# Altium PCB NBP11 Xilinx Spartan-III BGA456 Rev1.01.PcbDoc (part 1 of 3)
Units mm, origin at the board's own origin, x right, y up, seen from the top; angles counter-clockwise.
Board outline 69 x 80.99 mm, 6 copper layers (Top Layer, MidLayer1, InternalPlane1, InternalPlane2, MidLayer2, Bottom Layer); 105 components, 277 nets, 967 pads, 559 vias.
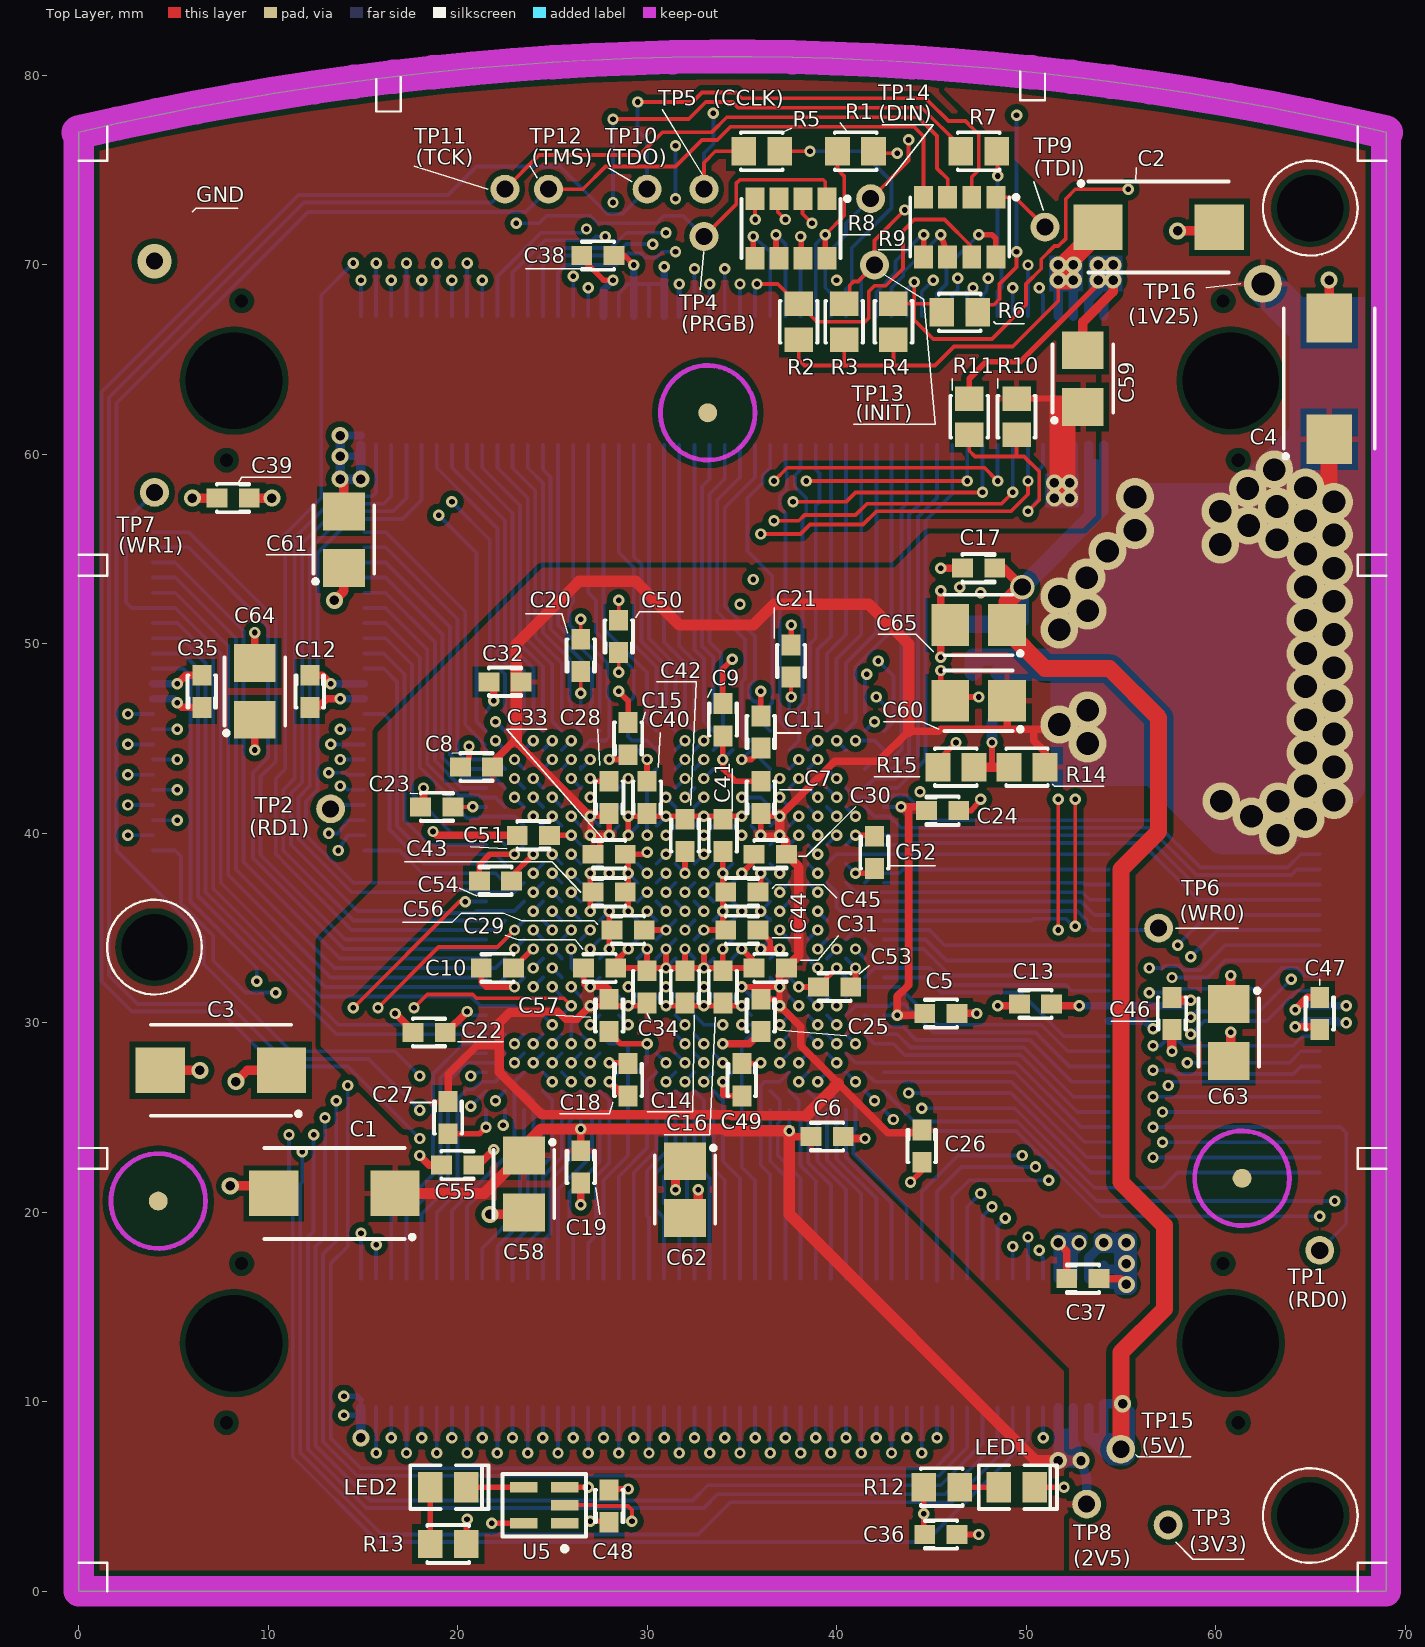
[diagram p0: Top Layer view]
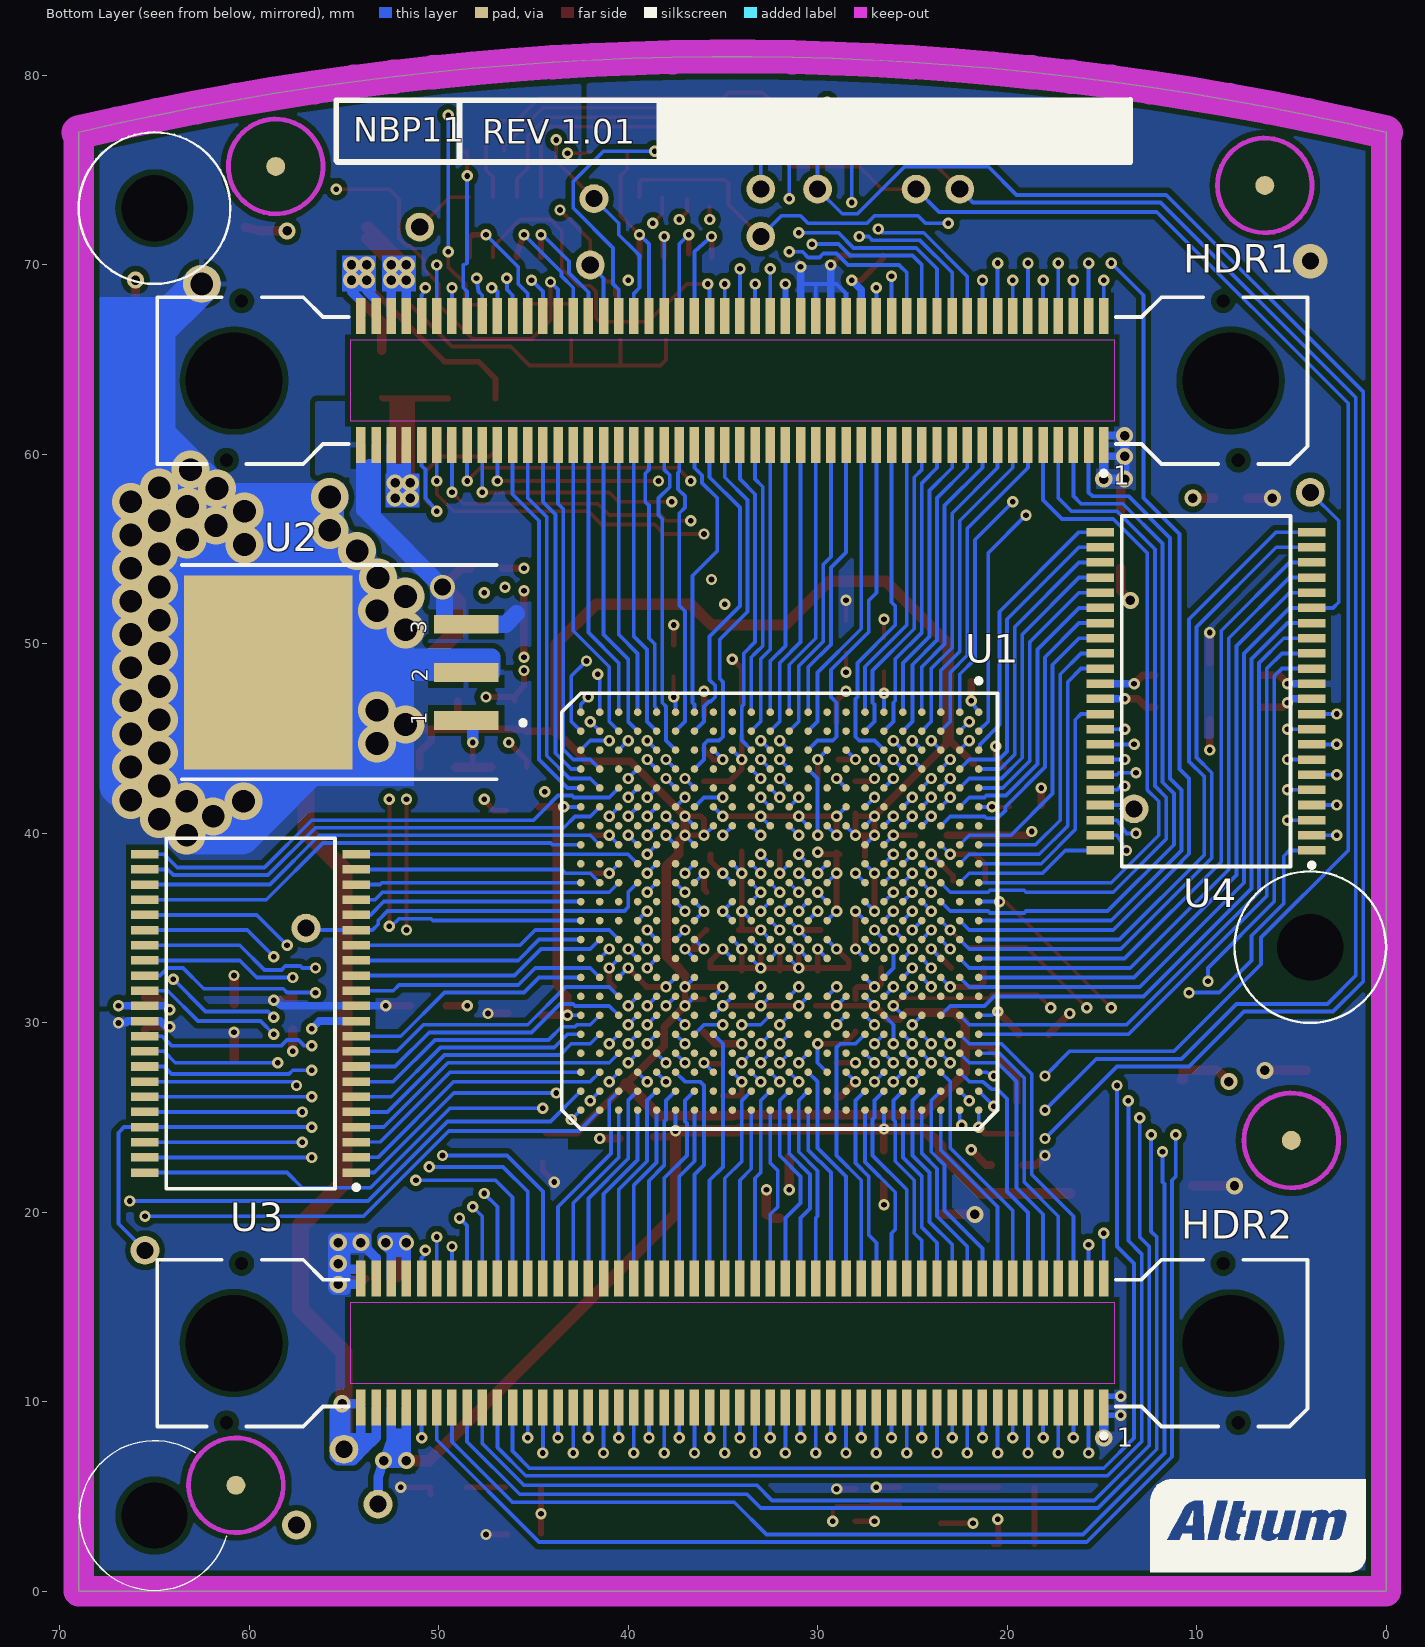
[diagram p1: Bottom Layer view, seen from below]
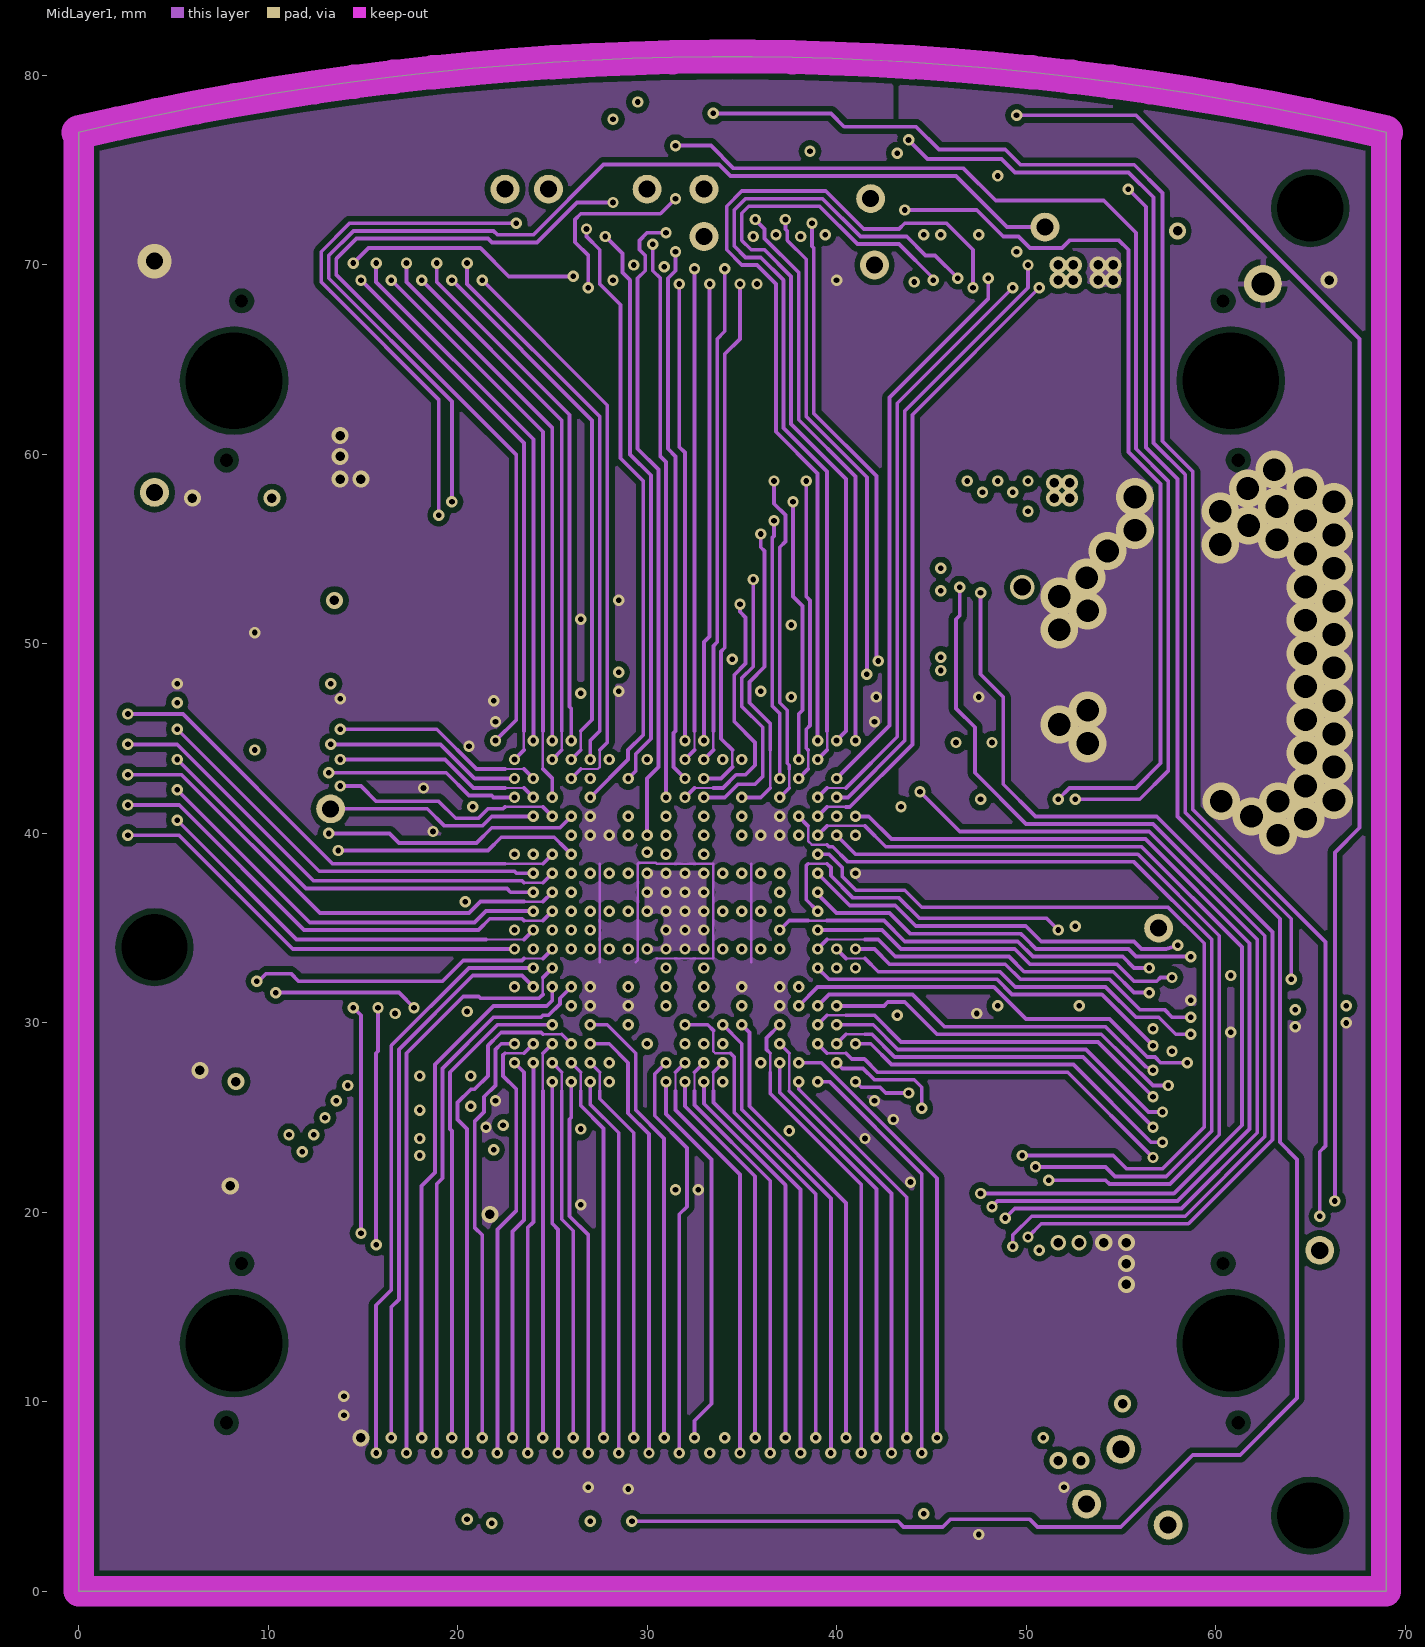
[diagram p2: MidLayer1]
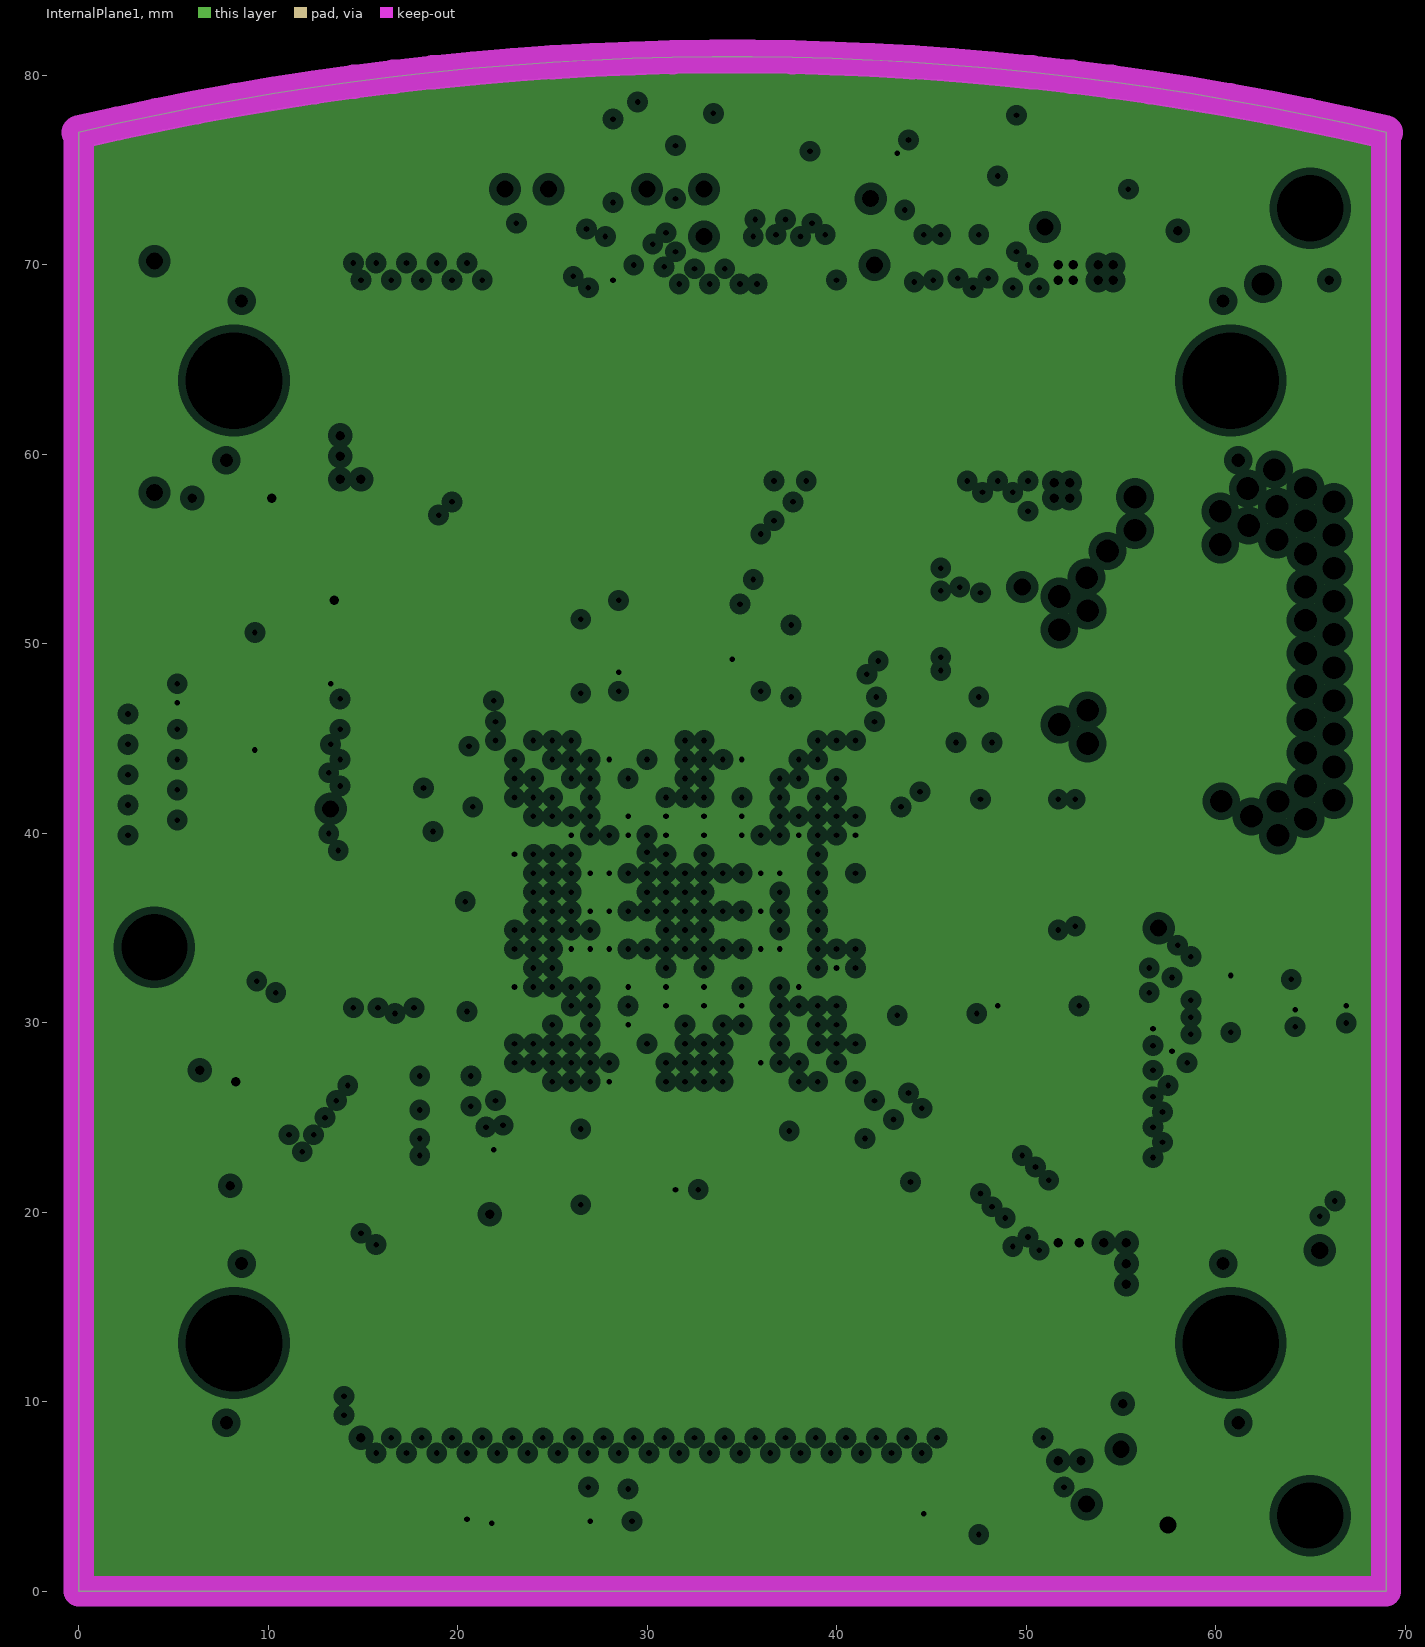
[diagram p3: InternalPlane1, clearances drawn from the general rule]
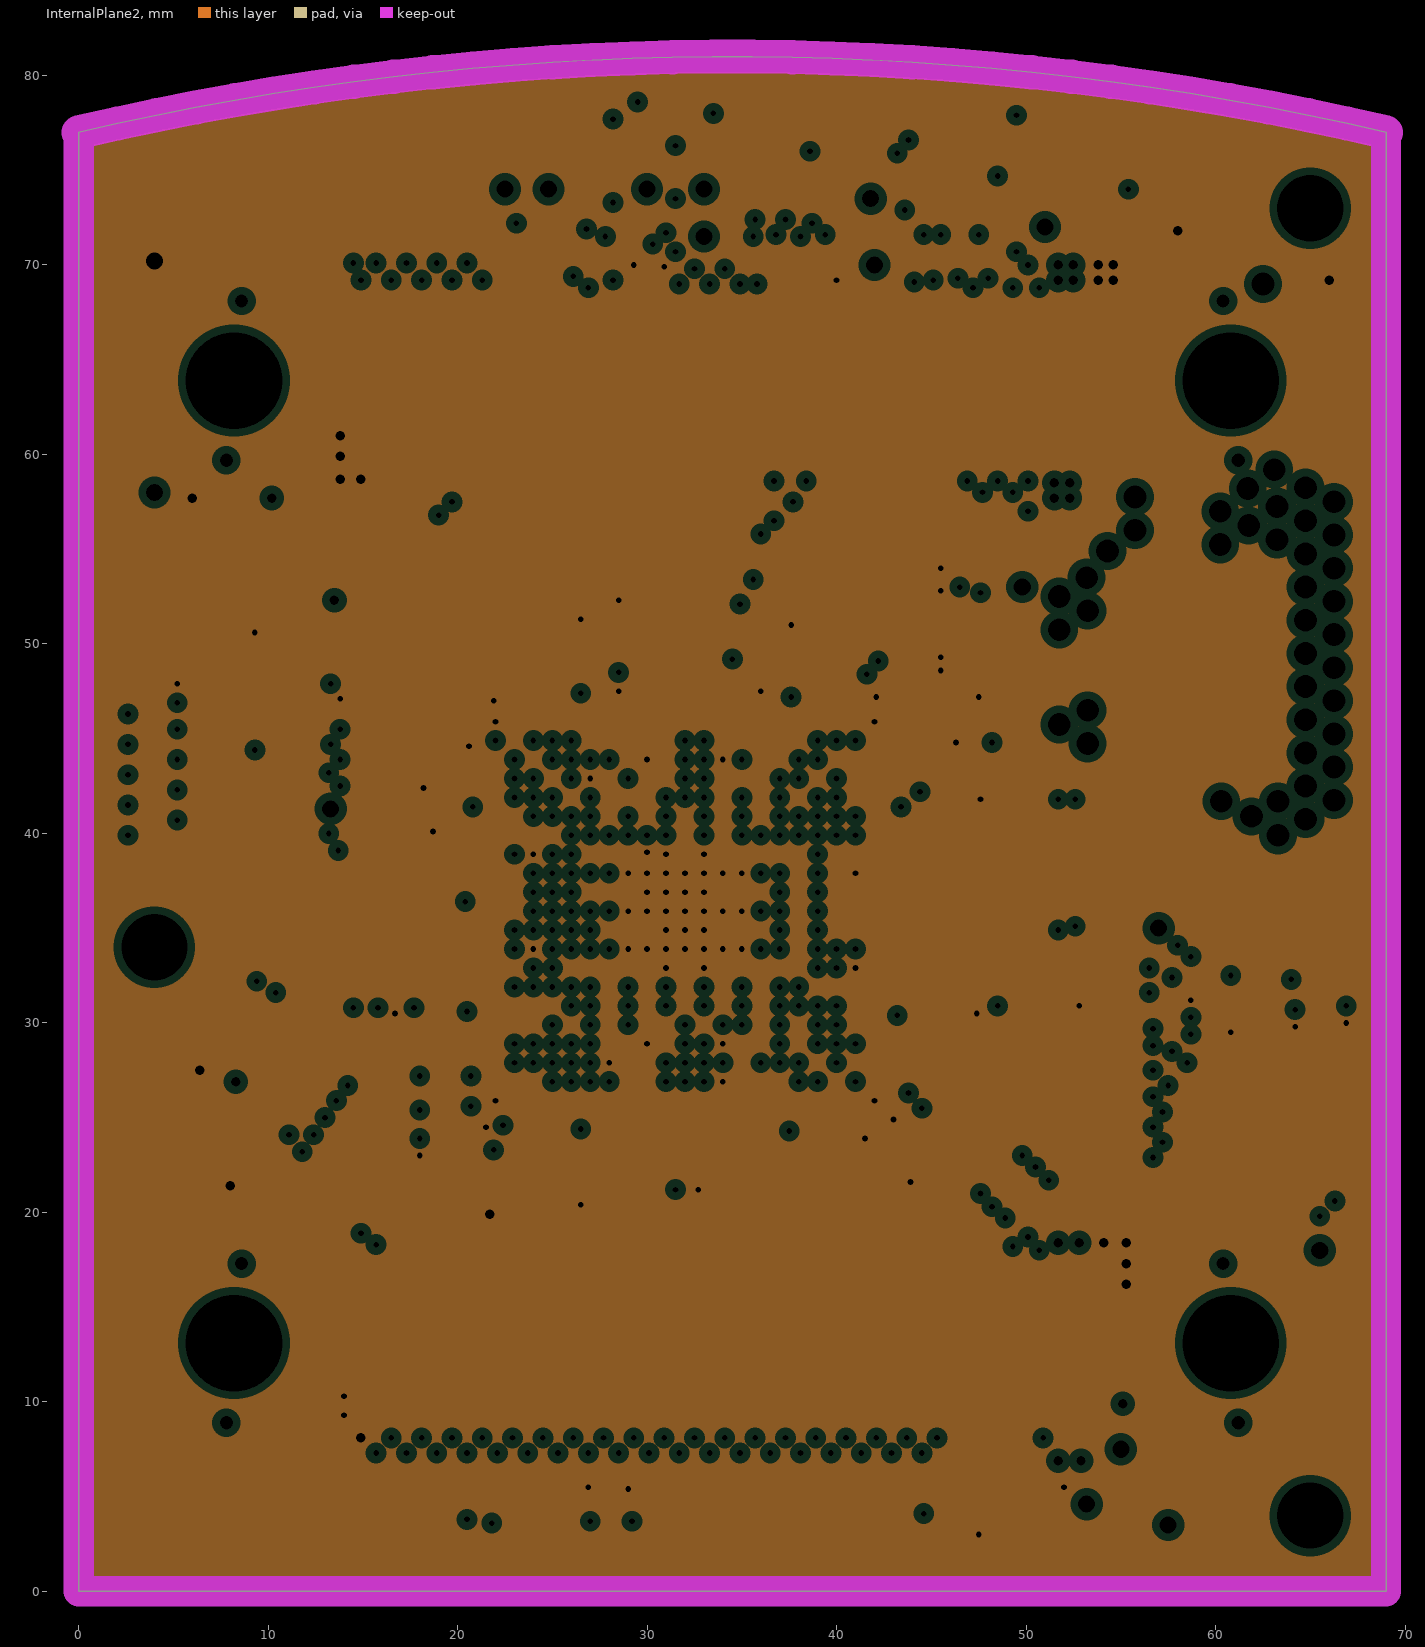
[diagram p4: InternalPlane2, clearances drawn from the general rule]
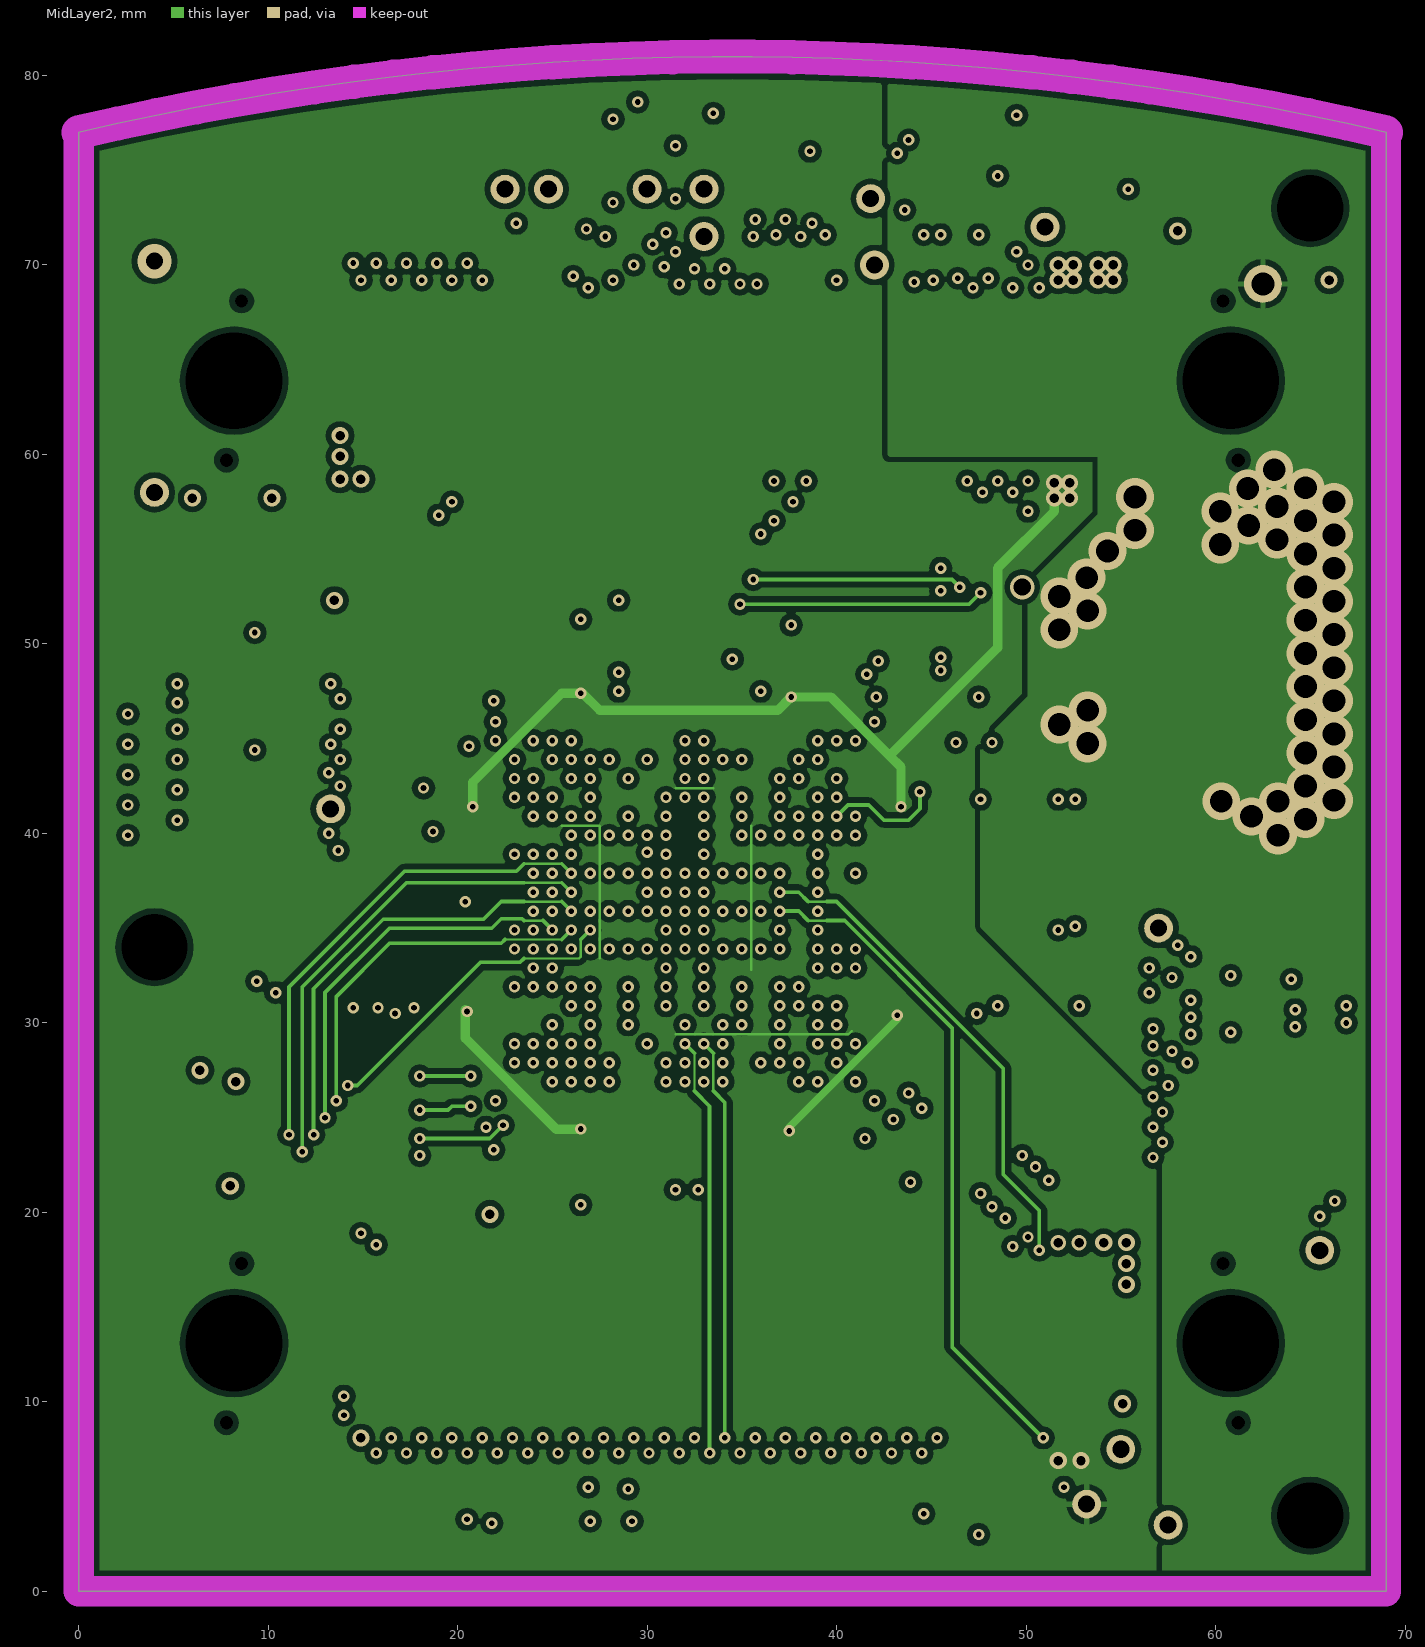
[diagram p5: MidLayer2]

## Layer stack, top to bottom
Top Layer: signal copper 0.0356
Dielectric: core 0.32, FR-4, Dk 4.8
MidLayer1: signal copper 0.0356
Dielectric: prepreg 0.32, FR-4, Dk 4.8
InternalPlane1: plane copper 0.0356, net VCC
Dielectric: core 0.32, FR-4, Dk 4.8
InternalPlane2: plane copper 0.0356, net GND
Dielectric: prepreg 0.32, FR-4, Dk 4.8
MidLayer2: signal copper 0.0356
Dielectric: core 0.32, FR-4, Dk 4.8
Bottom Layer: signal copper 0.0356

## Board outline
0,0 0.001,77 cw(c34.5,-69.801) 69,77 69,0

## Design rules (kind name [scope] priority, off if disabled: settings)
Clearance Clearance_Polygons [InPolygon] p1: gap=0.3
Clearance "InnerLayer Track-Via Clearance" [OnMid And IsTrack vs IsVia] p2: gap=0.127
Clearance "Via-Via Clearance" [IsVia vs IsVia] p3: gap=0.3
Clearance "Pad-Pad Clearance Same Net" [IsPad vs IsPad] p4: gap=0.254
Clearance "Via-Pad Clearance" [IsVia vs IsPad] p5: gap=0.2
Clearance "General Clearance" [All] p6: gap=0.2
ComponentClearance [All] p1: gap=0.2 collisioncheckmode=3 verticalgap=0.254 showdistances=FALSE
FabricationTestPointUsage TestPointUsage [All] p1 off: valid=0 allowmultiple=FALSE
FabricationTestpoint Testpoint [All] p1 off: side=3 testpointundercomponent=TRUE minsize=1.016 maxsize=2.54 preferedsize=1.524 minholesize=0 maxholesize=1.016 preferedholesize=0.813 testpointgrid=0.025 allowsidetop=TRUE allowsidebottom=TRUE usegrid=TRUE gridtolerance=0
HoleSize [All] p1: absolutevalues=TRUE maxlimit=5.2 minlimit=0.25 maxpercent=80.000 minpercent=20.000
PlaneClearance [All] p1: clearance=0.4
PlaneConnect [All] p1: planeconnectstyle=Direct reliefexpansion=0.5 reliefentries=4 reliefconductorwidth=0.25 reliefairgap=0.25
PolygonConnect [All] p1: connectstyle=Relief reliefconductorwidth=0.3 reliefentries=4 polygonreliefangle="90 Angle"
RoutingVias [All] p1 off: holewidth=0.3 width=0.6 viastyle="Through Hole" minholewidth=0.3 minwidth=0.6 maxholewidth=0.5 maxwidth=0.9
SMDNeckDown [All] p1: percent=100.000
SilkscreenOverComponentPads [All] p1: minsilkscreentomaskgap=0.254
SolderMaskExpansion SolderMaskExpansion_Vias [IsVia] p1: expansion=-0.65
SolderMaskExpansion [All] p2: expansion=0.1
Width [All] p1: maxlimit=2.5 minlimit=0.127 preferedwidth=0.203 toplayer_minwidth=0.2 toplayer_prefwidth=0.2 midlayer1_prefwidth=0.2 bottomlayer_prefwidth=0.2
21 further rules are at their usual default settings.

## Components (designator, comment, footprint, x,y, rotation, side; value= is the part's Value field where it differs from the comment)
C1 "220uF/4V" MCCT-D 13.5,21 r180 top
C2 "220uF/4V" MCCT-D 57,72 r0 top
C3 "220uF/4V" MCCT-D 7.5,27.5 r180 top
C4 "220uF/4V" MCCT-D 66,64 r90 top
C5 "220nF" CC1608-0603 45.5,30.5 r0 top
C6 "220nF" CC1608-0603 39.5,24 r0 top
C7 "220nF" CC1608-0603 36,41.9 r90 top
C8 "220nF" CC1608-0603 21,43.5 r180 top
C9 "220nF" CC1608-0603 34,46 r270 top
C10 "220nF" CC1608-0603 22.1,32.9 r0 top
C11 "220nF" CC1608-0603 36,45.35 r90 top
C12 "220nF" CC1608-0603 12.2,47.5 r270 top
C13 "220nF" CC1608-0603 50.5,31 r0 top
C14 "220nF" CC1608-0603 32,31.9 r90 top
C15 "220nF" CC1608-0603 29,45 r90 top
C16 "220nF" CC1608-0603 34,31.9 r90 top
C17 "220nF" CC1608-0603 47.5,54 r180 top
C18 "220nF" CC1608-0603 29,27 r270 top
C19 "10nF" CC1608-0603 26.5,22.4 r270 top
C20 "10nF" CC1608-0603 26.5,49.4 r90 top
C21 "10nF" CC1608-0603 37.6,49.1 r90 top
C22 "10nF" CC1608-0603 18.5,29.5 r180 top
C23 "10nF" CC1608-0603 18.9,41.4 r180 top
C24 "10nF" CC1608-0603 45.6,41.2 r0 top
C25 "10nF" CC1608-0603 36,30.4 r270 top
C26 "10nF" CC1608-0603 44.5,23.5 r270 top
C27 "10nF" CC1608-0603 19.5,25 r270 top
C28 "10nF" CC1608-0603 28,41.9 r90 top
C29 "10nF" CC1608-0603 27.5,32.9 r0 top
C30 "10nF" CC1608-0603 36.5,38.9 r180 top
C31 "10nF" CC1608-0603 36.5,32.9 r180 top
C32 "10nF" CC1608-0603 22.5,48 r180 top
C33 "10nF" CC1608-0603 28,38.9 r0 top
C34 "10nF" CC1608-0603 30,31.9 r90 top
C35 "10nF" CC1608-0603 6.5,47.5 r90 top
C36 "10nF" CC1608-0603 45.5,3 r0 top
C37 "10nF" CC1608-0603 53,16.5 r0 top
C38 "10nF" CC1608-0603 27.4,70.498 r0 top
C39 "10nF" CC1608-0603 8.15,57.7 r180 top
C40 "10nF" CC1608-0603 30,41.9 r90 top
C41 "10nF" CC1608-0603 34,39.9 r270 top
C42 "10nF" CC1608-0603 32,39.9 r270 top
C43 "10nF" CC1608-0603 28,36.9 r0 top
C44 "10nF" CC1608-0603 35,34.9 r180 top
C45 "10nF" CC1608-0603 35,36.9 r180 top
C46 "10nF" CC1608-0603 57.7,30.5 r90 top
C47 "10nF" CC1608-0603 65.5,30.5 r270 top
C48 "10nF" CC1608-0603 28,4.5 r90 top
C49 "10nF" CC1608-0603 35,27 r270 top
C50 "10nF" CC1608-0603 28.5,50.4 r90 top
C51 "10nF" CC1608-0603 24,39.9 r180 top
C52 "10nF" CC1608-0603 42,39 r270 top
C53 "10nF" CC1608-0603 39.9,31.9 r0 top
C54 "10nF" CC1608-0603 22,37.5 r0 top
C55 "10nF" CC1608-0603 20,22.5 r180 top
C56 "10nF" CC1608-0603 29,34.9 r0 top
C57 "10nF" CC1608-0603 28,30.4 r270 top
C58 "10uF" MCCT-B 23.5,21.5 r270 top
C59 "10uF" MCCT-B 53,64 r90 top
C60 "10uF" MCCT-B 47.5,47 r180 top
C61 "10uF" MCCT-B 14,55.5 r90 top
C62 "10uF" MCCT-B 32,21.2 r270 top
C63 "10uF" MCCT-B 60.7,29.5 r270 top
C64 "10uF" MCCT-B 9.3,47.5 r90 top
C65 "10uF" MCCT-B 47.5,51 r180 top
HDR1 "54075-1009-HD1" 54075 34.5,63.9 r0 bottom locked
HDR2 "54075-1009-HD2" 54075 34.5,13.1 r0 bottom locked
LED1 "HSMH-C170" "SMD _LED" 49.5,5.5 r180 top locked
LED2 "HSMG-C170" "SMD _LED" 19.5,5.5 r180 top locked
R1 "4k7" CR2012-0805 41,76 r0 top
R2 "4k7" CR2012-0805 38,67 r270 top
R3 "4k7" CR2012-0805 40.4,67 r270 top
R4 "4K7" CR2012-0805 43,67 r90 top
R5 "100R" CR2012-0805 36.05,76 r180 top
R6 "100R" CR2012-0805 46.5,67.5 r0 top
R7 "100R" CR2012-0805 47.5,76 r0 top
R8 "100R" MNR34 37.595,71.925 r270 top
R9 "100R" MNR34 46.5,72 r270 top
R10 "82R/1%" CR2012-0805 49.5,62 r270 top
R11 "680R/1%" CR2012-0805 47,62 r90 top
R12 "270R" CR2012-0805 45.55,5.5 r0 top
R13 "270R" CR2012-0805 19.5,2.5 r0 top
R14 "Do Not Mount" CR2012-0805 50.05,43.5 r180 top
R15 "0R" CR2012-0805 46.3,43.5 r180 top
TP1 "(RD0)" TestPin#1 65.5,18 r0 top
TP2 "(RD1)" TestPin#1 13.3,41.3 r90 top
TP3 "(3V3)" TestPin#1 57.5,3.5 r90 top
TP4 "(PRGB)" TestPin#1 33,71.5 r90 top
TP5 "(CCLK)" TestPin#1 33,74 r90 top
TP6 "(WR0)" TestPin#1 57,35 r90 top
TP7 "(WR1)" TestPin#1 4,58 r90 top
TP8 "(2V5)" TestPin#1 53.2,4.6 r90 top
TP9 "(TDI)" TestPin#1 51,72 r90 top
TP10 "(TDO)" TestPin#1 30,74 r90 top
TP11 "(TCK)" TestPin#1 22.5,74 r90 top
TP12 "(TMS)" TestPin#1 24.8,74 r90 top
TP13 "(INIT)" TestPin#1 42,70 r90 top
TP14 "(DIN)" TestPin#1 41.8,73.5 r90 top
TP15 "(5V)" TestPin#1 55,7.5 r90 top
TP16 "(1V25)" TestPin#2 62.5,69 r90 top
U1 "XC3S400-5FG456C" FG456 32,35.9 r270 bottom
U2 "LM1084IS-ADJ" TO-263 48.55,45.96 r90 bottom
U3 "SRAM 512Kx16 TSOP44" SO-G44/P.8 59.925,30.5 r90 bottom
U4 "SRAM 512Kx16 TSOP44" SO-G44/P.8 9.5,47.5 r90 bottom
U5 "SN74LVC1G04DBV" SO-G5/P.95 24.575,4.55 r90 top

## Footprints (in the part's own frame and the unit in brackets; to place one, negate y for a bottom-side part, rotate by r counter-clockwise, add the part's x,y. Pads: shape width x height; smd on the part's side, far side on the other; paste and mask are expansions set on the pad)
54075 [mm] "Connector; Docking Station, Receptacle; 100 Position; Vertical"
  rect 0.5x1.9 smd: 1(-19.6,3.4) 2(-19.6,-3.4) 3(-18.8,3.4) 4(-18.8,-3.4) 5(-18,3.4) 6(-18,-3.4) 7(-17.2,3.4) 8(-17.2,-3.4) 9(-16.4,3.4) 10(-16.4,-3.4) 11(-15.6,3.4) 12(-15.6,-3.4) 13(-14.8,3.4) 14(-14.8,-3.4) 15(-14,3.4) 16(-14,-3.4) 17(-13.2,3.4) 18(-13.2,-3.4) 19(-12.4,3.4) 20(-12.4,-3.4) 21(-11.6,3.4) 22(-11.6,-3.4) 23(-10.8,3.4) 24(-10.8,-3.4) 25(-10,3.4) 26(-10,-3.4) 27(-9.2,3.4) 28(-9.2,-3.4) 29(-8.4,3.4) 30(-8.4,-3.4) 31(-7.6,3.4) 32(-7.6,-3.4) 33(-6.8,3.4) 34(-6.8,-3.4) 35(-6,3.4) 36(-6,-3.4) 37(-5.2,3.4) 38(-5.2,-3.4) 39(-4.4,3.4) 40(-4.4,-3.4) 41(-3.6,3.4) 42(-3.6,-3.4) 43(-2.8,3.4) 44(-2.8,-3.4) 45(-2,3.4) 46(-2,-3.4) 47(-1.2,3.4) 48(-1.2,-3.4) 49(-0.4,3.4) 50(-0.4,-3.4) 51(0.4,3.4) 52(0.4,-3.4) 53(1.2,3.4) 54(1.2,-3.4) 55(2,3.4) 56(2,-3.4) 57(2.8,3.4) 58(2.8,-3.4) 59(3.6,3.4) 60(3.6,-3.4) 61(4.4,3.4) 62(4.4,-3.4) 63(5.2,3.4) 64(5.2,-3.4) 65(6,3.4) 66(6,-3.4) 67(6.8,3.4) 68(6.8,-3.4) 69(7.6,3.4) 70(7.6,-3.4) 71(8.4,3.4) 72(8.4,-3.4) 73(9.2,3.4) 74(9.2,-3.4) 75(10,3.4) 76(10,-3.4) 77(10.8,3.4) 78(10.8,-3.4) 79(11.6,3.4) 80(11.6,-3.4) 81(12.4,3.4) 82(12.4,-3.4) 83(13.2,3.4) 84(13.2,-3.4) 85(14,3.4) 86(14,-3.4) 87(14.8,3.4) 88(14.8,-3.4) 89(15.6,3.4) 90(15.6,-3.4) 91(16.4,3.4) 92(16.4,-3.4) 93(17.2,3.4) 94(17.2,-3.4) 95(18,3.4) 96(18,-3.4) 97(18.8,3.4) 98(18.8,-3.4) 99(19.6,3.4) 100(19.6,-3.4)
  round 0.5 hole 0.7 unplated: MH1(-26.7,4.2) MH2(-25.9,-4.2) MH3(26.7,4.2) MH4(25.9,-4.2)
  round 4.8 hole 5.1 unplated: MH5(-26.3,0) MH6(26.3,0)
  Top Layer keep-out region: -20.15,2.15 20.15,2.15 20.15,-2.15 -20.15,-2.15
  silkscreen extent -30.35,-4.4 30.35,5.02
CC1608-0603 [mm]
  rect 1.1x1 smd: 1(-0.85,0) 2(0.85,0)
  silkscreen extent -0.85,-0.75 0.85,0.75
CR2012-0805 [mm]
  rect 1.3x1.5 smd: 1(-0.95,0) 2(0.95,0)
  silkscreen extent -1.1,-1 1.1,1
FG456 [mm] "456-Ball Fine Pitch Ball Grid Array (FG456)"
  round 0.4 smd: A1(-10.5,10.5) A2(-9.5,10.5) A3(-8.5,10.5) A4(-7.5,10.5) A5(-6.5,10.5) A6(-5.5,10.5) A7(-4.5,10.5) A8(-3.5,10.5) A9(-2.5,10.5) A10(-1.5,10.5) A11(-0.5,10.5) A12(0.5,10.5) A13(1.5,10.5) A14(2.5,10.5) A15(3.5,10.5) A16(4.5,10.5) A17(5.5,10.5) A18(6.5,10.5) A19(7.5,10.5) A20(8.5,10.5) A21(9.5,10.5) A22(10.5,10.5) AA1(-10.5,-9.5) AA2(-9.5,-9.5) AA3(-8.5,-9.5) AA4(-7.5,-9.5) AA5(-6.5,-9.5) AA6(-5.5,-9.5) AA7(-4.5,-9.5) AA8(-3.5,-9.5) AA9(-2.5,-9.5) AA10(-1.5,-9.5) AA11(-0.5,-9.5) AA12(0.5,-9.5) AA13(1.5,-9.5) AA14(2.5,-9.5) AA15(3.5,-9.5) AA16(4.5,-9.5) AA17(5.5,-9.5) AA18(6.5,-9.5) AA19(7.5,-9.5) AA20(8.5,-9.5) AA21(9.5,-9.5) AA22(10.5,-9.5) AB1(-10.5,-10.5) AB2(-9.5,-10.5) AB3(-8.5,-10.5) AB4(-7.5,-10.5) AB5(-6.5,-10.5) AB6(-5.5,-10.5) AB7(-4.5,-10.5) AB8(-3.5,-10.5) AB9(-2.5,-10.5) AB10(-1.5,-10.5) AB11(-0.5,-10.5) AB12(0.5,-10.5) AB13(1.5,-10.5) AB14(2.5,-10.5) AB15(3.5,-10.5) AB16(4.5,-10.5) AB17(5.5,-10.5) AB18(6.5,-10.5) AB19(7.5,-10.5) AB20(8.5,-10.5) AB21(9.5,-10.5) AB22(10.5,-10.5) B1(-10.5,9.5) B2(-9.5,9.5) B3(-8.5,9.5) B4(-7.5,9.5) B5(-6.5,9.5) B6(-5.5,9.5) B7(-4.5,9.5) B8(-3.5,9.5) B9(-2.5,9.5) B10(-1.5,9.5) B11(-0.5,9.5) B12(0.5,9.5) B13(1.5,9.5) B14(2.5,9.5) B15(3.5,9.5) B16(4.5,9.5) B17(5.5,9.5) B18(6.5,9.5) B19(7.5,9.5) B20(8.5,9.5) B21(9.5,9.5) B22(10.5,9.5) C1(-10.5,8.5) C2(-9.5,8.5) C3(-8.5,8.5) C4(-7.5,8.5) C5(-6.5,8.5) C6(-5.5,8.5) C7(-4.5,8.5) C8(-3.5,8.5) C9(-2.5,8.5) C10(-1.5,8.5) C11(-0.5,8.5) C12(0.5,8.5) C13(1.5,8.5) C14(2.5,8.5) C15(3.5,8.5) C16(4.5,8.5) C17(5.5,8.5) C18(6.5,8.5) C19(7.5,8.5) C20(8.5,8.5) C21(9.5,8.5) C22(10.5,8.5) D1(-10.5,7.5) D2(-9.5,7.5) D3(-8.5,7.5) D4(-7.5,7.5) D5(-6.5,7.5) D6(-5.5,7.5) D7(-4.5,7.5) D8(-3.5,7.5) D9(-2.5,7.5) D10(-1.5,7.5) D11(-0.5,7.5) D12(0.5,7.5) D13(1.5,7.5) D14(2.5,7.5) D15(3.5,7.5) D16(4.5,7.5) D17(5.5,7.5) D18(6.5,7.5) D19(7.5,7.5) D20(8.5,7.5) D21(9.5,7.5) D22(10.5,7.5) E1(-10.5,6.5) E2(-9.5,6.5) E3(-8.5,6.5) E4(-7.5,6.5) E5(-6.5,6.5) E6(-5.5,6.5) E7(-4.5,6.5) E8(-3.5,6.5) E9(-2.5,6.5) E10(-1.5,6.5) E11(-0.5,6.5) E12(0.5,6.5) E13(1.5,6.5) E14(2.5,6.5) E15(3.5,6.5) E16(4.5,6.5) E17(5.5,6.5) E18(6.5,6.5) E19(7.5,6.5) E20(8.5,6.5) E21(9.5,6.5) E22(10.5,6.5) F1(-10.5,5.5) F2(-9.5,5.5) F3(-8.5,5.5) F4(-7.5,5.5) F5(-6.5,5.5) F6(-5.5,5.5) F7(-4.5,5.5) F8(-3.5,5.5) F9(-2.5,5.5) F10(-1.5,5.5) F11(-0.5,5.5) F12(0.5,5.5) F13(1.5,5.5) F14(2.5,5.5) F15(3.5,5.5) F16(4.5,5.5) F17(5.5,5.5) F18(6.5,5.5) F19(7.5,5.5) F20(8.5,5.5) F21(9.5,5.5) F22(10.5,5.5) G1(-10.5,4.5) G2(-9.5,4.5) G3(-8.5,4.5) G4(-7.5,4.5) G5(-6.5,4.5) G6(-5.5,4.5) G7(-4.5,4.5) G8(-3.5,4.5) G9(-2.5,4.5) G10(-1.5,4.5) G11(-0.5,4.5) G12(0.5,4.5) G13(1.5,4.5) G14(2.5,4.5) G15(3.5,4.5) G16(4.5,4.5) G17(5.5,4.5) G18(6.5,4.5) G19(7.5,4.5) G20(8.5,4.5) G21(9.5,4.5) G22(10.5,4.5) H1(-10.5,3.5) H2(-9.5,3.5) H3(-8.5,3.5) H4(-7.5,3.5) H5(-6.5,3.5) H6(-5.5,3.5) H7(-4.5,3.5) H16(4.5,3.5) H17(5.5,3.5) H18(6.5,3.5) H19(7.5,3.5) H20(8.5,3.5) H21(9.5,3.5) H22(10.5,3.5) J1(-10.5,2.5) J2(-9.5,2.5) J3(-8.5,2.5) J4(-7.5,2.5) J5(-6.5,2.5) J6(-5.5,2.5) J7(-4.5,2.5) J9(-2.5,2.5) J10(-1.5,2.5) J11(-0.5,2.5) J12(0.5,2.5) J13(1.5,2.5) J14(2.5,2.5) J16(4.5,2.5) J17(5.5,2.5) J18(6.5,2.5) J19(7.5,2.5) J20(8.5,2.5) J21(9.5,2.5) J22(10.5,2.5) K1(-10.5,1.5) K2(-9.5,1.5) K3(-8.5,1.5) K4(-7.5,1.5) K5(-6.5,1.5) K6(-5.5,1.5) K7(-4.5,1.5) K9(-2.5,1.5) K10(-1.5,1.5) K11(-0.5,1.5) K12(0.5,1.5) K13(1.5,1.5) K14(2.5,1.5) K16(4.5,1.5) K17(5.5,1.5) K18(6.5,1.5) K19(7.5,1.5) K20(8.5,1.5) K21(9.5,1.5) K22(10.5,1.5) L1(-10.5,0.5) L2(-9.5,0.5) L3(-8.5,0.5) L4(-7.5,0.5) L5(-6.5,0.5) L6(-5.5,0.5) L7(-4.5,0.5) L9(-2.5,0.5) L10(-1.5,0.5) L11(-0.5,0.5) L12(0.5,0.5) L13(1.5,0.5) L14(2.5,0.5) L16(4.5,0.5) L17(5.5,0.5) L18(6.5,0.5) L19(7.5,0.5) L20(8.5,0.5) L21(9.5,0.5) L22(10.5,0.5) M1(-10.5,-0.5) M2(-9.5,-0.5) M3(-8.5,-0.5) M4(-7.5,-0.5) M5(-6.5,-0.5) M6(-5.5,-0.5) M7(-4.5,-0.5) M9(-2.5,-0.5) M10(-1.5,-0.5) M11(-0.5,-0.5) M12(0.5,-0.5) M13(1.5,-0.5) M14(2.5,-0.5) M16(4.5,-0.5) M17(5.5,-0.5) M18(6.5,-0.5) M19(7.5,-0.5) M20(8.5,-0.5) M21(9.5,-0.5) M22(10.5,-0.5) N1(-10.5,-1.5) N2(-9.5,-1.5) N3(-8.5,-1.5) N4(-7.5,-1.5) N5(-6.5,-1.5) N6(-5.5,-1.5) N7(-4.5,-1.5) N9(-2.5,-1.5) N10(-1.5,-1.5) N11(-0.5,-1.5) N12(0.5,-1.5) N13(1.5,-1.5) N14(2.5,-1.5) N16(4.5,-1.5) N17(5.5,-1.5) N18(6.5,-1.5) N19(7.5,-1.5) N20(8.5,-1.5) N21(9.5,-1.5) N22(10.5,-1.5) P1(-10.5,-2.5) P2(-9.5,-2.5) P3(-8.5,-2.5) P4(-7.5,-2.5) P5(-6.5,-2.5) P6(-5.5,-2.5) P7(-4.5,-2.5) P9(-2.5,-2.5) P10(-1.5,-2.5) P11(-0.5,-2.5) P12(0.5,-2.5) P13(1.5,-2.5) P14(2.5,-2.5) P16(4.5,-2.5) P17(5.5,-2.5) P18(6.5,-2.5) P19(7.5,-2.5) P20(8.5,-2.5) P21(9.5,-2.5) P22(10.5,-2.5) R1(-10.5,-3.5) R2(-9.5,-3.5) R3(-8.5,-3.5) R4(-7.5,-3.5) R5(-6.5,-3.5) R6(-5.5,-3.5) R7(-4.5,-3.5) R16(4.5,-3.5) R17(5.5,-3.5) R18(6.5,-3.5) R19(7.5,-3.5) R20(8.5,-3.5) R21(9.5,-3.5) R22(10.5,-3.5) T1(-10.5,-4.5) T2(-9.5,-4.5) T3(-8.5,-4.5) T4(-7.5,-4.5) T5(-6.5,-4.5) T6(-5.5,-4.5) T7(-4.5,-4.5) T8(-3.5,-4.5) T9(-2.5,-4.5) T10(-1.5,-4.5) T11(-0.5,-4.5) T12(0.5,-4.5) T13(1.5,-4.5) T14(2.5,-4.5) T15(3.5,-4.5) T16(4.5,-4.5) T17(5.5,-4.5) T18(6.5,-4.5) T19(7.5,-4.5) T20(8.5,-4.5) T21(9.5,-4.5) T22(10.5,-4.5) U1(-10.5,-5.5) U2(-9.5,-5.5) U3(-8.5,-5.5) U4(-7.5,-5.5) U5(-6.5,-5.5) U6(-5.5,-5.5) U7(-4.5,-5.5) U8(-3.5,-5.5) U9(-2.5,-5.5) U10(-1.5,-5.5) U11(-0.5,-5.5) U12(0.5,-5.5) U13(1.5,-5.5) U14(2.5,-5.5) U15(3.5,-5.5) U16(4.5,-5.5) U17(5.5,-5.5) U18(6.5,-5.5) U19(7.5,-5.5) U20(8.5,-5.5) U21(9.5,-5.5) U22(10.5,-5.5) V1(-10.5,-6.5) V2(-9.5,-6.5) V3(-8.5,-6.5) V4(-7.5,-6.5) V5(-6.5,-6.5) V6(-5.5,-6.5) V7(-4.5,-6.5) V8(-3.5,-6.5) V9(-2.5,-6.5) V10(-1.5,-6.5) V11(-0.5,-6.5) V12(0.5,-6.5) V13(1.5,-6.5) V14(2.5,-6.5) V15(3.5,-6.5) V16(4.5,-6.5) V17(5.5,-6.5) V18(6.5,-6.5) V19(7.5,-6.5) V20(8.5,-6.5) V21(9.5,-6.5) V22(10.5,-6.5) W1(-10.5,-7.5) W2(-9.5,-7.5) W3(-8.5,-7.5) W4(-7.5,-7.5) W5(-6.5,-7.5) W6(-5.5,-7.5) W7(-4.5,-7.5) W8(-3.5,-7.5) W9(-2.5,-7.5) W10(-1.5,-7.5) W11(-0.5,-7.5) W12(0.5,-7.5) W13(1.5,-7.5) W14(2.5,-7.5) W15(3.5,-7.5) W16(4.5,-7.5) W17(5.5,-7.5) W18(6.5,-7.5) W19(7.5,-7.5) W20(8.5,-7.5) W21(9.5,-7.5) W22(10.5,-7.5) Y1(-10.5,-8.5) Y2(-9.5,-8.5) Y3(-8.5,-8.5) Y4(-7.5,-8.5) Y5(-6.5,-8.5) Y6(-5.5,-8.5) Y7(-4.5,-8.5) Y8(-3.5,-8.5) Y9(-2.5,-8.5) Y10(-1.5,-8.5) Y11(-0.5,-8.5) Y12(0.5,-8.5) Y13(1.5,-8.5) Y14(2.5,-8.5) Y15(3.5,-8.5) Y16(4.5,-8.5) Y17(5.5,-8.5) Y18(6.5,-8.5) Y19(7.5,-8.5) Y20(8.5,-8.5) Y21(9.5,-8.5) Y22(10.5,-8.5)
  silkscreen extent -12.27,-11.5 11.5,11.5
MCCT-B [mm]
  rect 2x2.2 smd: 1(-1.5,0) 2(1.5,0)
  silkscreen extent -2.3,-1.6 1.8,1.6
MCCT-D [mm]
  rect 2.6x2.4 smd: 1(-3.2,0) 2(3.2,0)
  silkscreen extent -4.2,-2.4 3.7,2.4
MNR34 [mm]
  rect 1.2x1 smd: 1(-1.575,1.905) 2(-1.575,0.635) 3(-1.575,-0.635) 4(-1.575,-1.905) 5(1.575,-1.905) 6(1.575,-0.635) 7(1.575,0.635) 8(1.575,1.905)
  silkscreen extent -1.67,-2.62 1.55,3.07
"SMD _LED" [mm]
  rect 1.3x1.6 smd: 1(0.95,0) 2(-0.95,0)
  silkscreen extent -2.13,-1.15 2,1.15
SO-G5/P.95 [mm]
  rect 0.55x1.45 smd: 1(-0.95,-1.075) 2(0,-1.075) 3(0.95,-1.075) 4(0.95,1.075) 5(-0.95,1.075)
  silkscreen extent -2.42,-2.2 1.65,2.2
SO-G44/P.8 [mm]
  rect 0.45x1.45 smd: 1(-8.4,-5.575) 2(-7.6,-5.575) 3(-6.8,-5.575) 4(-6,-5.575) 5(-5.2,-5.575) 6(-4.4,-5.575) 7(-3.6,-5.575) 8(-2.8,-5.575) 9(-2,-5.575) 10(-1.2,-5.575) 11(-0.4,-5.575) 12(0.4,-5.575) 13(1.2,-5.575) 14(2,-5.575) 15(2.8,-5.575) 16(3.6,-5.575) 17(4.4,-5.575) 18(5.2,-5.575) 19(6,-5.575) 20(6.8,-5.575) 21(7.6,-5.575) 22(8.4,-5.575) 23(8.4,5.575) 24(7.6,5.575) 25(6.8,5.575) 26(6,5.575) 27(5.2,5.575) 28(4.4,5.575) 29(3.6,5.575) 30(2.8,5.575) 31(2,5.575) 32(1.2,5.575) 33(0.4,5.575) 34(-0.4,5.575) 35(-1.2,5.575) 36(-2,5.575) 37(-2.8,5.575) 38(-3.6,5.575) 39(-4.4,5.575) 40(-5.2,5.575) 41(-6,5.575) 42(-6.8,5.575) 43(-7.6,5.575) 44(-8.4,5.575)
  silkscreen extent -9.3,-5.7 9.25,4.45
TestPin#1 [mil] "SingleTest Pin"
  round 60 hole 35.43: 1(0,0)
TestPin#2 [mil] "SingleTest Pin"
  round 78.74 hole 47.24: 1(0,0)
TO-263 [mm]
  rect 1x3.4 smd: 1(0,0) 2(2.54,0) 3(5.08,0)
  rect 10.25x8.9 smd: 4(2.54,10.45)
  silkscreen extent -3.1,-3.12 8.2,15

## Part data
C1 C2 C3 C4 C58 C59 C60 C61 C62 C63 C64 C65: library part CAP_POLAR, "Polar Capacitor"
C5 C6 C7 C8 C9 C10 C11 C12 C13 C14 C15 C16 C17 C18 C19 C20 C21 C22 C23 C24 C25 C26 C27 C28 C29 C30 C31 C32 C33 C34 C35 C36 C37 C38 C39 C40 C41 C42 C43 C44 C45 C46 C47 C48 C49 C50 C51 C52 C53 C54 C55 C56 C57: library part CAP, "Capacitor"
HDR1 HDR2: "Board-to-Board, Docking Station, 0.80mm (.031\") Pitch, Shielded Receptacle, Vertical, Ultra Low Profile, SMT"
LED1 LED2: library part HSMX-C670, "Typical RED GaAs SMD LED Agilent make"
R1 R2 R3 R4 R5 R6 R7 R10 R11 R12 R13 R14 R15: library part RES, "Resistor"
R8 R9: library part MNR34, "3216x4 Resistor Array"
TP1 TP2 TP3 TP4 TP5 TP6 TP7 TP8 TP9 TP10 TP11 TP12 TP13 TP14 TP15 TP16: library part TestPin
U1: "Spartan-3 1.2V FPGA, 264 User I/Os, 456-ball FBGA, High Performance, Commercial Grade"
U2: "5A Low Dropout Possitive Regulators"
U3 U4: "512Kx16Bit SRAM TSOP44"
U5: library part SN74AHC1G04DBVR

## Free pads (board coordinates)
  round 1 smd mask+2: FID(4.2,20.6) FID(33.2,62.2) FID(61.4,21.8)
  round 1 smd far side mask+2: FID(5,23.8) FID(6.4,74.2) FID(58.6,75.2) FID(60.7,5.6)
  round 3.2 hole 3.5 unplated: LP(4,34) LP(65,4) LP(65,73)

## Via types
v1: diameter 0.6, hole 0.3, Top Layer to Bottom Layer, tented both sides, 480 vias
v2: diameter 2, hole 1.2, Top Layer to Bottom Layer, tented both sides, 42 vias
v3: diameter 0.9, hole 0.5, Top Layer to Bottom Layer, tented both sides, 33 vias
v4: diameter 0.8, hole 0.5, Top Layer to Bottom Layer, tented both sides, 2 vias
v5: diameter 1.3, hole 0.9, Top Layer to Bottom Layer, tented both sides, 1 vias
v6: diameter 1.8, hole 0.9, Top Layer to Bottom Layer, tented both sides, 1 vias

## Nets (pads, with @x,y where several pads share a name; then routed paths per layer and width w, separated by ;. In a path a pad name is that pad's centre, name@x,y a point inside that pad or via, vN(x,y) a via of type N, cw(c..) or ccw(c..) an arc to the next point about the centre after c; other vN are vias at no path point)
+5: C17.1 C65.1 HDR1.97 HDR1.99 HDR2.97 HDR2.99 TP15.1 U2.3 | length 99.5
  Top Layer w0.5: C17.1@48.35,54 48.8,54 v5(49.8,53)
  Top Layer w0.9: C65.1@48.9,50.8 51,48.7 54.4,48.7 57,46.1 57,40.1 55,38.1 55,21.6 57.3,19.3 57.3,14.9 55,12.6 55,9.9 TP15.1@55,7.5 ; C65.1@49,51 49,52.2 v5(49.8,53)
  Bottom Layer w0.5: U2.3@49.5,51.5 49.5,53 49.65,53.15 53.3,56.8 ; U2.3@49.9,51.2 49.9,52.8 49.95,52.85 54.1,57 HDR1.99@54.1,60.5 ; 53.149,56.649 53.3,56.8 ; HDR2.97@53.3,9.7 53.3,8.1 ; HDR1.97@53.3,60.5 53.3,59.5 ; HDR2.99@54.1,9.7 54.1,8.1 ; HDR2.99@54.1,9.9 v3(55.1,9.9) 55.5,9.5 55.5,7.5 55.5,7.1 55.45,7.05 55.3,6.9 55,6.9 54.5,6.9 54.45,6.95 53.9,7.5 ; TP15.1@55,7.5 54.1,7.5 ; 55.1,8.3 54.9,8.1 54.1,8.1 ; 53.3,8.1 54.1,8.1 ; 53.3,8.1 53.9,7.5 ; 53.3,56.8 53.3,59.5 ; 53.3,56.8 53.7,57.2 53.7,59.5 53.3,59.5 ; 53.9,7.5 54.1,7.5 ; 54.1,7.5 54.1,8.1
  Bottom Layer w0.9: 45.9,51.6 46.46,51.04 U2.3@48.55,51.04 ; TP15.1@55,7.5 55.1,7.6 55.1,8.3 v3(55.1,9.9)
AUDIO_SPI_CSN: HDR1.11 U1.C2 | length 17
  Bottom Layer w0.2: HDR1.11@18.9,60.5 18.9,59.3 22.1,56.1 22.1,49.4 23,48.5 23,45.9 U1.C2@23.5,45.4
BLUE0: HDR1.14 U1.E4 | length 31.4
  MidLayer1 w0.127: 26.5,44.4 26.5,45.4
  MidLayer1 w0.2: v1(19.7,69.2) 27.1,61.8 27.1,46 26.5,45.4 ; v1(26,43.9) 26.5,44.4
  Bottom Layer w0.2: HDR1.14@19.7,67.3 v1(19.7,69.2) ; U1.E4@25.5,43.4 v1(26,43.9)
BLUE1: HDR1.16 U1.F4 | length 33
  MidLayer1 w0.2: v1(20.5,70.1) 20.5,69 27.5,62 27.5,45.4 27,44.9 v1(27,43.9)
  Bottom Layer w0.2: HDR1.16@20.5,67.3 v1(20.5,70.1) ; U1.F4@26.5,43.5 26.55,43.45 U1.F4@26.5,43.4 v1(27,43.9)
BOC_CTS: HDR1.13 U1.C1 | length 15.7
  Bottom Layer w0.2: HDR1.13@19.7,60.5 19.7,59.3 22.5,56.5 22.5,49.6 23.5,48.6 U1.C1@23.5,46.4
BOC_RTS: HDR1.17 U1.D1 | length 15.4
  Bottom Layer w0.2: HDR1.17@21.3,60.5 21.3,59.3 23.3,57.3 23.3,50 24.5,48.8 U1.D1@24.5,46.4
BOC_RX: HDR1.19 U1.E2 | length 16.5
  Bottom Layer w0.2: HDR1.19@22.1,60.5 22.1,59.3 23.7,57.7 23.7,50.2 25,48.9 25,45.9 U1.E2@25.5,45.4
BOC_TX: HDR1.15 U1.D2 | length 16.8
  Bottom Layer w0.2: HDR1.15@20.5,60.5 20.5,59.3 22.9,56.9 22.9,49.8 24,48.7 24,45.9 U1.D2@24.5,45.4
BUZZER: HDR2.24 U1.E22 | length 9.6
  Bottom Layer w0.2: HDR2.24@23.7,16.5 23.7,18.4 24.5,19.2 24.5,21.9 25.5,22.9 U1.E22@25.5,25.4
CAN_RXD: HDR1.4 U1.C3 | length 32.1
  MidLayer1 w0.2: v1(15.7,70.1) 15.7,69.1 24,60.8 v1(24,44.9)
  Bottom Layer w0.2: HDR1.4@15.7,67.3 v1(15.7,70.1) ; U1.C3@23.5,44.4 v1(24,44.9)
CAN_TXD: HDR1.2 U1.C4 | length 31.7
  MidLayer1 w0.127: 23.5,44.4 23.5,45.4
  MidLayer1 w0.2: v1(14.9,69.2) 23.5,60.6 23.5,45.4 ; v1(23,43.9) 23.5,44.4
  Bottom Layer w0.2: HDR1.2@14.9,67.3 v1(14.9,69.2) ; v1(23,43.9) U1.C4@23.5,43.4
FPGA_AUX0: R7.1 U1.B3 | length 70.9
  Top Layer w0.2: v1(28.2,77.698) 32.198,77.698 33.1,78.6 34.5,78.6 34.8,78.3 44.5,78.3 46.55,76.25 R7.1@46.55,76
  MidLayer1 w0.2: v1(22,44.9) 23.1,46 23.1,59.966 13.6,69.466 13.6,70.334 14.666,71.4 21.6,71.4 21.808,71.192 24.192,71.192 26.3,73.3 v1(28.2,73.3)
  Bottom Layer w0.2: v1(22,44.9) U1.B3@22.5,44.4 ; v1(28.2,73.3) v1(28.2,77.698)
FPGA_AUX0_R: HDR1.86 R7.2 | length 9.2
  Top Layer w0.2: v1(48.5,74.7) 48.5,76 48.7,76 R7.2@48.6,75.9
  Bottom Layer w0.2: HDR1.86@48.5,67.3 48.5,68.6 48.7,68.8 48.7,70 48.5,70.1 v1(48.5,74.7)
FPGA_AUX1: HDR1.88 U1.V5 | length 34
  MidLayer1 w0.127: 39.5,42.4 40.5,42.4
  MidLayer1 w0.2: v1(39,41.9) 39.5,42.4 ; 40.5,42.4 43.2,45.1 43.2,62.7 v1(49.3,68.8)
  Bottom Layer w0.2: U1.V5@38.5,42.4 v1(39,41.9) ; HDR1.88@49.3,67.3 v1(49.3,68.8)
FPGA_AUX2: HDR1.90 U1.W5 | length 36
  MidLayer1 w0.2: v1(40,41.9) 40.6,41.9 43.6,44.9 43.6,62.3 50.1,68.8 v1(50.1,70)
  Bottom Layer w0.2: U1.W5@39.5,42.4 v1(40,41.9) ; HDR1.90@50.1,67.3 50.1,68.8 v1(50.1,70)
FPGA_AUX3: HDR1.92 U1.V6 | length 35.7
  MidLayer1 w0.127: 39.5,41.4 40.5,41.4
  MidLayer1 w0.2: v1(39,40.9) 39.5,41.4 ; 40.5,41.4 40.7,41.4 44,44.7 44,62.1 v1(50.7,68.8)
  Bottom Layer w0.2: U1.V6@38.5,41.4 v1(39,40.9) ; v1(50.7,68.8) 50.9,68.4 HDR1.92@50.9,67.3
FPGA_CCLK: R5.2 TP5.1 U1.AA22 | length 117.4
  Top Layer w0.2: TP5.1@33,74 33,75.4 33.6,76 R5.2@35.1,76
  MidLayer1 w0.2: v1(33.5,78) 39.7,78 40.4,77.3 44.2,77.3 45.4,76.1 48.9,76.1 49.713,75.287 55.713,75.287 57.2,73.8 57.2,60.7 58.8,59.1 58.8,41.266 65.8,34.266 65.8,23.5 65.5,23.2 v1(65.5,19.8)
  Bottom Layer w0.2: TP5.1@33,74 33,75.9 33.5,76.4 v1(33.5,78) ; U1.AA22@41.5,25.4 42.6,24.3 49.469,24.3 53.969,19.8 v1(65.5,19.8)
FPGA_CCLK_R: HDR1.66 R5.1 | length 14.7
  Top Layer w0.2: R5.1@37,76 v1(38.6,76)
  Bottom Layer w0.2: v1(38.6,76) 41.294,76 41.297,76.003 42.9,74.4 42.9,73 40.8,70.9 40.8,69 40.5,68.7 HDR1.66@40.5,67.3
FPGA_CLK: HDR2.2 U1.A11 | length 23.8
  Top Layer w0.2: v1(14.5,30.8) 20.1,36.4 v1(20.4,36.4)
  MidLayer1 w0.2: v1(14.5,30.8) 14.9,30.4 v1(14.9,18.9)
  Bottom Layer w0.2: HDR2.2@14.9,16.5 v1(14.9,18.9) ; v1(20.4,36.4) U1.A11@21.5,36.4
FPGA_CLK_1: HDR1.30 U1.B12 | length 61.5
  MidLayer1 w0.2: v1(14.5,70.1) 15.3,70.9 21.2,70.9 22.7,69.4 v1(26.1,69.4)
  Bottom Layer w0.2: 10.4,38.934 10.4,42.9 10.9,43.4 10.9,55.8 12.8,57.7 12.8,68.4 v1(14.5,70.1) ; 10.417,38.917 10.8,38.534 10.8,38.5 14.4,34.9 22,34.9 U1.B12@22.5,35.4 ; HDR1.30@26.1,67.3 v1(26.1,69.4)
FPGA_CLK_2: HDR1.32 U1.AB12 | length 91.8
  Top Layer w0.2: v1(52.6,35.1) v1(52.6,41.8)
  MidLayer1 w0.2: v1(26.9,68.8) 26.9,70.5 26.2,71.2 26.2,72.4 26.5,72.7 30.7,72.7 v1(31.5,73.5) ; v1(31.5,76.3) 33.366,76.3 34.566,75.1 46.7,75.1 48.4,73.4 54.1,73.4 55.8,71.7 55.8,60.3 57.5,58.6 57.5,43.3 56,41.8 v1(52.6,41.8)
  Bottom Layer w0.2: HDR1.32@26.9,67.3 v1(26.9,68.8) ; v1(31.5,73.5) v1(31.5,76.3) ; U1.AB12@42.5,35.4 50.3,35.4 50.4,35.5 52.1,35.5 52.5,35.1 v1(52.6,35.1)
FPGA_DIN: HDR1.64 TP14.1 U1.AA14 | length 95.7
  Top Layer w0.2: TP14.1@41.8,73.5 43.8,75.5 v1(43.8,76.6)
  MidLayer1 w0.2: v1(41,33.9) 42,33.9 42.8,33.1 48.9,33.1 49.7,32.3 54.4,32.3 56,30.7 57.3,30.7 57.7,30.3 v1(58.7,30.3) ; v1(43.8,76.6) 44.8,75.6 48.7,75.6 49.413,74.887 55.413,74.887 56.727,73.573 56.727,60.608 58.4,58.934 58.4,41.1 64,35.5 v1(64,32.3)
  Bottom Layer w0.2: HDR1.64@39.7,67.3 39.7,68.5 39.4,68.8 39.4,70.5 39.7,70.8 40.5,71.6 40.5,72.2 TP14.1@41.8,73.5 ; v1(41,33.9) 41.45,33.45 U1.AA14@41.5,33.4 ; v1(58.7,30.3) 59,30.6 62.3,30.6 v1(64,32.3)
FPGA_DONE: R6.2 U1.AB21 | length 106.5
  Top Layer w0.2: R6.2@47.5,67.9 48.3,67.9 48.592,68.192 48.592,68.992 49.5,69.9 v1(49.5,70.7)
  MidLayer1 w0.2: v1(49.5,77.9) 55.8,77.9 67.6,66.1 67.6,40.3 66.3,39 v1(66.3,20.6)
  Bottom Layer w0.2: U1.AB21@42.5,26.4 44.1,24.8 49.534,24.8 53.734,20.6 v1(66.3,20.6) ; v1(49.5,70.7) v1(49.5,77.9)
FPGA_DONE_R: HDR1.74 R4.2 R6.1 U5.2 | length 134
  Top Layer w0.2: U5.2@25.65,4.55 27.2,4.55 27.25,4.5 29,4.5 29.2,4.3 v1(29.2,3.7) ; R4.2@42.8,67.95 R4.2@43,67.95 44.1,67.95 ; v1(44.1,69.1) 44.1,67.95 ; R6.1@45.5,67.95 45.45,67.9 45.3,67.9 45.25,67.95 44.1,67.95 ; v1(55.4,74) 52.6,74 52.1,73.5 52.1,71.4 51.7,71 51.5,71 50.8,70.3 50.8,69.8 50,69 50,67.9 48.2,66.1 45.1,66.1 44.1,67.1 44.1,67.95
  MidLayer1 w0.2: v1(29.2,3.7) 43.235,3.7 43.535,3.4 45.6,3.4 46,3.8 50.2,3.8 50.6,3.4 55,3.4 58.8,7.2 61.3,7.2 64.3,10.2 64.3,22.8 63.4,23.7 63.4,35.5 58,40.9 58,58.7 56.327,60.373 56.327,73.073 v1(55.4,74)
  Bottom Layer w0.2: HDR1.74@43.7,67.3 43.7,68.7 v1(44.1,69.1)
FPGA_INIT: HDR1.68 R3.1 TP13.1 U1.W12 | length 81.7
  Top Layer w0.2: R3.1@40.4,67.95 40.4,68.1 40.7,68.4 40.7,68.932 40.9,69.132 41.132,69.132 TP13.1@42,70 42,71.3 v1(43.6,72.9) ; v1(51.7,34.9) v1(51.7,41.8)
  MidLayer1 w0.127: 38.5,38.4 39.5,38.4
  MidLayer1 w0.2: 38.5,38.4 38.4,38.3 38.4,36.5 v1(39,35.9) ; 39.5,38.4 39.7,38.2 39.7,37.766 40.866,36.6 43.3,36.6 44.381,35.519 51.081,35.519 v1(51.7,34.9) ; v1(43.6,72.9) 47.4,72.9 48.8,71.5 49.6,71.5 50.2,70.9 51.9,70.9 52.3,71.3 54.9,71.3 55.4,70.8 55.4,60.134 57.1,58.434 57.1,43.7 55.8,42.4 52.3,42.4 v1(51.7,41.8)
  Bottom Layer w0.2: v1(39,35.9) 39.45,35.45 U1.W12@39.5,35.4 ; HDR1.68@41.3,67.3 41.3,69.3 TP13.1@42,70
FPGA_M0: R8.2 U1.AB2 | length 30.4
  Top Layer w0.2: R8.2@38.2,73.6 38.2,73.5 38.2,72.7 v1(38.7,72.2)
  MidLayer1 w0.2: v1(38.7,72.2) 38.7,71 38.8,70.9 38.8,62.166 42.1,58.866 42.1,49.2 v1(42.2,49.1)
  Bottom Layer w0.2: v1(42.2,49.1) 43,48.3 43,45.9 U1.AB2@42.5,45.4
FPGA_M0_R: HDR1.60 R8.7 | length 5.4
  Top Layer w0.3: v1(38.1,71.5) 38.135,71.565 38.135,71.5 R8.7@38.135,70.425
  Bottom Layer w0.2: HDR1.60@38.1,67.3 v1(38.1,71.5)
FPGA_M1: R8.3 U1.AA1 | length 29.1
  Top Layer w0.2: R8.3@36.9,73.5 36.9,72.8 v1(37.3,72.4)
  MidLayer1 w0.2: v1(37.3,72.4) 37.3,71.9 37.4,71.8 37.4,71.3 38.4,70.3 38.4,62 41.6,58.8 v1(41.6,48.4)
  Bottom Layer w0.2: U1.AA1@41.5,46.4 41.5,48.4 v1(41.6,48.4)
FPGA_M1_R: HDR1.58 R8.6 | length 5.5
  Top Layer w0.3: R8.6@36.8,70.6 v1(36.8,71.6)
  Bottom Layer w0.2: v1(36.8,71.6) 37.3,71.1 HDR1.58@37.3,67.3
FPGA_M2: R8.4 U1.AB3 | length 32.1
  Top Layer w0.2: v1(35.7,72.4) R8.4@35.7,73.1
  MidLayer1 w0.2: v1(35.7,72.4) 36.2,71.9 36.2,71.4 38,69.6 38,61.834 41,58.834 v1(41,44.9)
  Bottom Layer w0.2: v1(41,44.9) 42,44.9 U1.AB3@42.5,44.4
FPGA_M2_R: HDR1.56 R8.5 | length 5.9
  Top Layer w0.3: R8.5@35.595,70.425 35.595,71.5 35.595,71.595 v1(35.6,71.5)
  Bottom Layer w0.2: v1(35.6,71.5) 36.5,70.7 HDR1.56@36.5,67.3
FPGA_PROGRAM: R8.1 TP4.1 U1.A2 | length 59.9
  Top Layer w0.2: TP4.1@33,71.5 34.7,73.2 34.7,74.3 34.9,74.5 39.3,74.5 39.405,74.395 R8.1@39.405,73.575
  MidLayer1 w0.2: 13.3,68.6 13.369,68.531 ; v1(19,56.8) 19,62.9 13.369,68.531 ; v1(23.1,72.2) 14.3,72.2 12.8,70.7 12.8,69.1 13.369,68.531
  Bottom Layer w0.2: v1(19,56.8) 21,54.8 21,45.9 21.45,45.45 U1.A2@21.5,45.4 ; v1(23.1,72.2) 24.3,72.2 24.7,72.6 27,72.6 27.4,72.2 30.5,72.2 30.9,72.6 31.9,72.6 TP4.1@33,71.5
FPGA_PROGRAM_R: HDR1.62 R1.1 R8.8 | length 10.6
  Top Layer w0.2: v1(39.4,71.6) 40.4,72.6 40.4,74.7 40.05,75.05 R1.1@40.05,76
  Top Layer w0.3: v1(39.4,71.6) 39.4,70.43 R8.8@39.405,70.425
  Bottom Layer w0.2: HDR1.62@38.9,67.3 38.9,71.1 v1(39.4,71.6)
FPGA_TCK: R9.3 TP11.1 U1.A21 | length 107.5
  Top Layer w0.2: TP11.1@22.5,74 24.3,75.8 29.6,75.8 30.8,77 33.4,77 34.2,77.8 44.3,77.8 45.3,76.8 45.3,75.1 45.865,74.535 R9.3@45.865,73.575
  MidLayer2 w0.2: v1(18,25.4) 19.5,25.4 19.7,25.6 v1(20.7,25.6)
  Bottom Layer w0.2: v1(18,25.4) 15.3,28.1 10.8,28.1 7.9,31 3.1,31 1.6,32.5 1.6,63 11.9,73.3 21.8,73.3 TP11.1@22.5,74 ; v1(20.7,25.6) U1.A21@21.5,26.4
FPGA_TCK_R: HDR1.72 R9.6 | length 6.6
  Top Layer w0.3: v1(45.5,71.6) 45.9,70.46 R9.6@45.865,70.425
  Bottom Layer w0.2: HDR1.72@42.9,67.3 42.9,68.8 43.517,69.417 43.517,69.617 v1(45.5,71.6)
FPGA_TDI: R9.1 TP9.1 U1.B1 | length 72.5
  Top Layer w0.2: R9.1@48.405,73.575 49.425,73.575 TP9.1@51,72
  MidLayer1 w0.2: v1(19.7,57.5) 19.7,62.8 13.2,69.3 13.2,70.5 14.5,71.8 21.9,71.8 22.1,71.6 24,71.6 27.7,75.3 33.8,75.3 34.4,74.7 46.3,74.7 49,72 TP9.1@51,72
  Bottom Layer w0.2: v1(19.7,57.5) 21.7,55.5 21.7,49.2 22.5,48.4 U1.B1@22.5,46.4
FPGA_TDI_R: HDR1.78 R9.8 | length 7.2
  Top Layer w0.3: v1(47.5,71.6) 48.2,71.6 48.4,71.4 48.4,70.43 R9.8@48.405,70.425
  Bottom Layer w0.2: HDR1.78@45.3,67.3 45.3,68.5 45.8,69 45.8,69.9 v1(47.5,71.6)
FPGA_TDO: R9.2 TP10.1 U1.B22 | length 119.6
  Top Layer w0.2: v1(29.5,78.6) 32.4,78.6 32.9,79.1 34.7,79.1 35,78.8 44.7,78.8 44.882,78.618 45.9,77.6 46.8,77.6 47.5,76.9 47.5,75 47.135,74.635 R9.2@47.135,73.575
  MidLayer2 w0.2: v1(18,23.9) 21.7,23.9 v1(22.4,24.6)
  Bottom Layer w0.2: v1(18,23.9) 14.2,27.7 10.4,27.7 7.5,30.6 2.8,30.6 1.2,32.2 1.2,63.3 11.6,73.7 19.5,73.7 21,75.2 25.4,75.2 27.9,72.7 28.7,72.7 TP10.1@30,74 30,76.6 29.5,77.1 v1(29.5,78.6) ; v1(22.4,24.6) 22.5,24.8 U1.B22@22.5,25.4
FPGA_TDO_R: HDR1.54 R2.1 R9.7 | length 19.3
  Top Layer w0.2: v1(35.8,69) 36.9,69 37.95,67.95 R2.1@38,67.95 38.95,67 41.5,67 41.7,67.2 41.7,68.6 42,68.9 42.6,68.9 43.5,69.8 43.5,71.8 44.1,72.4 45.7,72.4 47.135,70.965 R9.7@47.135,70.425
  Bottom Layer w0.2: HDR1.54@35.7,67.3 35.7,68.9 v1(35.8,69)
FPGA_TMS: R9.4 TP12.1 U1.A20 | length 101
  Top Layer w0.2: TP12.1@24.8,74 26.6,74 27.8,75.2 31.5,75.2 32.9,76.6 33.7,76.6 34.4,77.3 44.09,77.3 44.595,76.795 R9.4@44.595,73.575
  MidLayer2 w0.2: v1(18,27.2) v1(20.7,27.2)
  Bottom Layer w0.2: v1(18,27.2) 16.7,28.5 11.2,28.5 6.6,33.1 6.6,34.5 2,39.1 2,62.7 12.1,72.8 23.6,72.8 TP12.1@24.8,74 ; v1(20.7,27.2) 21.1,27.4 U1.A20@21.5,27.4
FPGA_TMS_R: HDR1.70 R9.5 | length 6.6
  Top Layer w0.3: R9.5@44.595,70.425 44.6,70.43 v1(44.6,71.6)
  Bottom Layer w0.2: HDR1.70@42.1,67.3 42.1,68.566 43.117,69.583 43.117,70.2 44.517,71.6 v1(44.6,71.6)
GND: C1.2 C2.2 C3.2 C4.2 C5.2 C6.2 C7.2 C8.2 C9.2 C10.2 C11.2 C12.2 C13.2 C14.2 C15.2 C16.2 C17.2 C18.1 C19.2 C20.2 C21.2 C22.2 C23.2 C24.2 C25.2 C26.2 C27.2 C28.2 C29.2 C30.2 C31.2 C32.2 C33.2 C34.2 C35.2 C36.2 C37.2 C38.2 C39.2 C40.2 C41.2 C42.2 C43.2 C44.2 C45.2 C46.2 C47.2 C48.2 C49.2 C50.2 C51.2 C52.2 C53.2 C54.2 C55.2 C56.2 C57.2 C58.2 C59.2 C60.2 C61.2 C62.2 C63.2 C64.2 C65.2 HDR1.1 HDR1.36 HDR1.38 HDR1.40 HDR1.42 HDR1.98 HDR1.100 HDR2.1 HDR2.98 HDR2.100 LED1.2 R11.2 R15.2 U1.A1 U1.A22 U1.AA2 U1.AA21 U1.AB1 U1.AB22 U1.B2 U1.B21 U1.C9 U1.C14 U1.J3 U1.J9 U1.J10 U1.J11 U1.J12 U1.J13 U1.J14 U1.J20 U1.K9 U1.K10 U1.K11 U1.K12 U1.K13 U1.K14 U1.L9 U1.L10 U1.L11 U1.L12 U1.L13 U1.L14 U1.M9 U1.M10 U1.M11 U1.M12 U1.M13 U1.M14 U1.N9 U1.N10 U1.N11 U1.N12 U1.N13 U1.N14 U1.P3 U1.P9 U1.P10 U1.P11 U1.P12 U1.P13 U1.P14 U1.P20 U1.Y9 U1.Y14 U3.12 U3.34 U4.12 U4.34 U5.3 | length 232
  Top Layer w0.2: C20.2@26.5,50.3 v1(26.5,51.3) ; C50.2@28.5,51.2 C50.2@28.5,51.25 v1(28.5,52.3)
  Top Layer w0.3: C27.2@19.5,24.15 21.15,24.15 v1(21.5,24.5) ; C8.2@20.15,43.5 20.6,43.95 v1(20.6,44.6) ; C54.2@22.85,37.5 22.85,37.75 v1(24,38.9) ; C10.2@22.95,32.9 23.95,33.9 v1(24,33.9) ; U5.3@25.7,5.5 v1(26.9,5.5) ; v1(27,42.9) 27.25,42.75 C28.2@28,42.75 ; C48.2@28,5.4 v1(29,5.4) ; v1(28,27.9) C18.1@29,27.9 ; C57.2@28,29.55 28,29.5 28.6,28.9 v1(30,28.9) ; C38.2@28.25,70.498 28.802,70.498 v1(29.3,70) ; v1(28.5,47.5) 29,47 C15.2@29,45.85 ; C33.2@28.85,38.9 C33.2@29,38.9 ; v1(29,33.9) 28.35,33.25 C29.2@28.35,32.9 C34.2@30,32.9 ; v1(29,35.9) 29,36.9 v1(29,37.9) C33.2@29,38.9 ; C33.2@29,39 C33.2@29,38.9 ; C56.2@29.85,34.9 v1(31,34.9) ; C34.2@30,32.75 C34.2@30,32.9 ; v1(30,33.9) C34.2@30,32.9 ; v1(30,39) 29.8,38.9 C33.2@29,38.9 ; C40.2@30,42.75 v1(30,43.9) ; v1(31,33.9) v1(31,32.9) ; C14.2@32,32.75 C14.2@32,32.9 ; v1(32,33.9) C14.2@32,32.9 ; v1(32,37.9) C42.2@32,39.05 ; v1(33,33.9) v1(33,32.9) ; v1(33,34.9) C44.2@34,34.9 ; v1(34,26.9) 34,26.2 34.05,26.15 C49.2@35,26.15 ; C16.2@34,32.75 C16.2@34,32.9 ; v1(34,33.9) C16.2@34,32.9 ; C41.2@34,39.05 v1(34,37.9) 34,36.9 v1(34,35.9) C44.2@34,34.9 ; C9.2@34,45.15 v1(34,43.9) 34,43.4 34.65,42.75 C7.2@36,42.75 ; C44.2@34.15,34.9 C44.2@34,34.9 ; v1(35,33.9) 35.65,33.25 C31.2@35.65,32.9 C16.2@34,32.9 ; v1(35,37.9) 35.65,38.55 C30.2@35.65,38.9 ; C11.2@36,46.2 v1(36,47.5) ; C21.2@37.6,49.95 v1(37.6,51) ; C53.2@40.75,31.9 41,32.15 v1(41,32.9) ; v1(41,37.9) C52.2@41.9,37.9 ; v1(43.9,21.6) 44.5,22.2 C26.2@44.5,22.65 ; R15.2@45.35,43.5 45.35,43.85 v1(46.3,44.8) ; v1(45.5,48.6) 45.5,47.8 C60.2@46,47.2 ; C60.2@46,47 C60.2@46,47.2 ; C36.2@46.35,3 v1(47.5,3) ; C24.2@46.45,41.2 47.1,41.2 v1(47.6,41.8) ; R11.2@47,62.95 47,64 47.9,64.9 49.7,64.9 53.8,69 v3(53.8,69.2) v3(53.8,70) ; v1(47.5,47.2) C60.2@46,47.2 ; LED1.2@50.45,5.5 LED1.2@50.45,5.3 ; v1(52,5.5) 50.5,5.5 50.497,5.488 LED1.2@50.45,5.3 ; C34.2@30,32.9 v1(31,32.9) ; v1(31,32.9) C14.2@32,32.9 ; C14.2@32,32.9 v1(33,32.9) ; v1(33,32.9) C16.2@34,32.9 ; LED1.2@50.45,5.3 50.45,5.15 50.4,5.1 LED1.2@50.45,5.3
  Top Layer w0.4: v1(5.2,47.9) 5.65,48.35 C35.2@6.5,48.35 ; C64.2@9.3,49 v1(9.3,50.6) ; C12.2@12.2,46.65 12.65,46.65 13.1,47.1 v1(13.8,47.1) ; v1(16.7,30.5) 17.675,29.525 C22.2@17.8,29.4 ; v1(18,23) 18.5,22.5 C55.2@19.15,22.5 ; C23.2@18.2,41.5 v1(18.2,42.4) ; v1(18.7,40.1) 18.9,39.9 C51.2@23.15,39.9 ; v1@21.9,47.05 C32.2@21.9,48 ; v1(26.5,20.4) C19.2@26.5,21.55 ; v1(34,28.9) 35.4,28.9 C25.2@36,29.5 ; C6.2@40.45,23.9 v1(41.5,23.9) ; v1(45.5,49.3) 45.5,51 v1(45.5,52.8) ; v1(45.5,54) C17.2@46.65,54 ; C5.2@46.35,30.5 v1(47.4,30.5) ; C13.2@51.5,30.9 v1(52.8,30.9) ; C37.2@53.85,16.5 55,16.5 v3(55.3,16.2) ; v1(64.2,29.8) 65.35,29.8 C47.2@65.5,29.65
  Top Layer w0.5: C3.2@4.2,27.5 C3.2@4.3,27.5 v3(6.4,27.5) ; v3(6,57.7) C39.2@7.3,57.7 ; v3(8,21.4) C1.2@10.2,21.4 ; v3(13.8,58.7) 14,58.5 C61.2@14,57 ; v3(21.7,19.9) C58.2@23.5,19.9 ; C62.2@32,19.7 32.3,19.7 32.7,19.9 v1(32.7,21.2) ; C59.2@53,65.5 53,67 54.6,68.6 v3(54.6,69.2) ; C46.2@57.7,31.4 C46.2@57.7,31.35 57.7,31.2 v1(58.7,31.2) ; v3(58,71.8) 59.4,71.8 C2.2@60.2,72 ; C63.2@60.8,28.1 v1(60.8,29.5) ; C4.2@66,67.2 v3(66,69.2)
  Bottom Layer w0.2: HDR2.1@14.9,9.7 HDR2.1@14.9,10.1 ; v1(21.5,24.5) U1.A22@21.5,25.4 ; U1.A1@21.5,46.4 v1(21.9,47) ; v1(22,25.9) U1.B21@22.5,26.4 ; v1(22,45.9) U1.B2@22.5,45.4 ; U1.C14@23.5,33.4 v1(24,33.9) ; U1.C9@23.5,38.4 v1(24,38.9) ; HDR1.36@28.5,67.3 28.5,68.5 29,69 30.9,69 ; v1(29,33.9) U1.J13@29.5,34.4 ; v1(29,35.9) 29.45,35.45 U1.J12@29.5,35.4 ; v1(29,37.9) 29.45,37.45 U1.J10@29.5,37.4 ; 29.3,69 v1(29.3,70) ; U1.J20@29.5,27.4 30,27.9 v1(30,28.9) ; U1.J14@29.5,33.4 29.55,33.45 v1(30,33.9) ; U1.J11@29.5,36.4 29.55,36.45 v1(30,36.9) ; U1.J9@29.5,38.4 v1(30,37.9) ; U1.J3@29.5,44.4 v1(30,43.9) ; v1(30,35.9) 30.45,35.45 U1.K12@30.5,35.4 ; HDR1.40@30.1,67.3 30.1,69 ; U1.K14@30.5,33.4 v1(31,33.9) U1.L13@31.5,34.4 ; U1.K13@30.5,34.4 30.55,34.45 v1(31,34.9) U1.L12@31.5,35.4 ; U1.K11@30.5,36.4 v1(31,35.9) ; U1.K10@30.5,37.4 v1(31,37.9) ; U1.K9@30.5,38.4 30.55,38.45 v1(31,38.9) ; HDR1.42@30.9,67.2 v1(30.9,69.9) v1@30.9,69.8 ; v1(31,32.9) U1.L14@31.5,33.4 ; v1(31,36.9) U1.L10@31.5,37.4 ; U1.L11@31.5,36.4 v1(32,35.9) ; U1.L9@31.5,38.4 v1(32,37.9) ; v1(32,33.9) 32.45,33.45 U1.M14@32.5,33.4 ; v1(32,34.9) U1.M12@32.5,35.4 ; v1(32,36.9) U1.M10@32.5,37.4 ; U1.M13@32.5,34.4 v1(33,34.9) ; U1.M11@32.5,36.4 v1(33,35.9) ; U1.M9@32.5,38.4 32.55,38.45 v1(33,38.9) ; v1(33,32.9) U1.N14@33.5,33.4 ; v1(33,33.9) U1.N13@33.5,34.4 ; v1(33,37.9) U1.N9@33.5,38.4 ; U1.N12@33.5,35.4 33.55,35.45 v1(34,35.9) ; U1.N11@33.5,36.4 v1(33,36.9) U1.N10@33.5,37.4 ; v1(34,26.9) U1.P20@34.5,27.4 ; v1(34,33.9) U1.P13@34.5,34.4 ; v1(34,37.9) U1.P9@34.5,38.4 ; v1(34,43.9) U1.P3@34.5,44.4 ; U1.P14@34.5,33.4 34.55,33.45 v1(35,33.9) ; U1.P12@34.5,35.4 34.55,35.45 v1(35,35.9) U1.P11@34.5,36.4 ; U1.P10@34.5,37.4 34.55,37.45 v1(35,37.9) ; U1.Y14@40.5,33.4 v1(41,32.9) ; U1.Y9@40.5,38.4 v1(41,37.9) ; U1.AA21@41.5,26.4 v1(42,25.9) ; U1.AA2@41.5,45.4 41.55,45.45 v1(42,45.9) ; v1(42.1,47.2) 42.5,46.8 U1.AB1@42.5,46.4 ; U1.AB22@42.5,25.4 v1(43,24.9)
  Bottom Layer w0.3: v1(14,9.3) HDR2.1@14.9,9.3 ; v1(14,10.3) 14.7,10.3 HDR2.1@14.9,10.1
  Bottom Layer w0.4: U4.12@3.925,47.9 v1(5.2,47.9) ; v1(13.8,47.1) U4.34@15.075,47.1 ; v3(13.8,59.9) HDR1.1@14.9,59.9 ; v3(13.8,61) HDR1.1@14.9,61 ; HDR1.38@29.3,67.3 29.3,69.8 v1(29.3,70) ; HDR1.42@30.9,67.3 30.9,69.8 v1(30.9,69.9) ; v1(52.8,30.9) 54.3,30.9 U3.12@54.35,30.9 55.225,30.9 ; 55.3,30.9 58.3,30.9 v1(58.7,31.2) ; v1(64.2,29.8) 64.4,29.8 64.7,30.1 U3.34@65.5,30.1 66.4,30.1 66.5,30 v1(66.9,30)
  Bottom Layer w0.5: v3(13.8,61) v3(13.8,59.9) v3(13.8,58.7) v3(14.9,58.7) 14.9,59.9 HDR1.1@14.9,60.5 ; v3(14.9,8.1) 14.9,9.3 HDR2.1@14.9,9.7 ; HDR2.98@53.3,16.5 53.3,17.6 ; HDR1.98@53.3,67.3 53.3,68.15 53.8,68.65 v3(53.8,69.2) v3(53.8,70) ; HDR2.100@54.1,17.2 54.1,17.1 HDR2.100@54.1,17 ; HDR1.100@54.1,67.3 54.1,68.1 54.6,68.6 v3(54.6,69.2) v3(54.6,70) ; 53.3,17.6 v3@53.8,18.1 ; 53.3,17.6 v3@53.8,18.1 ; v3@53.8,18.1 v3@53.8,18.4 ; v3@53.8,18.1 54.1,18.1 54.697,18.1 54.848,17.948 ; v3@53.8,18.1 v3(54.1,18.4) ; v3@53.8,18.4 53.8,18.7 54.1,18.7 55.3,18.7 55.6,18.7 55.6,18.4 55.6,17.3 55.6,16.2 55.6,16 55.55,15.95 55.5,15.9 55.3,15.9 54.9,15.9 v3@54.9,16.2 ; v3@53.8,18.4 v3(54.1,18.4) ; HDR2.100@54.1,17 HDR2.100@54.1,16.5 54.1,16.2 v3@54.9,16.2 ; HDR2.100@54.1,17 54.9,17 ; v3(54.1,18.4) v3(55.3,18.4) ; 54.848,17.948 54.9,17.897 54.9,17.3 54.9,17 ; 54.848,17.948 v3(55.3,18.4) ; v3@54.9,16.2 v3(55.3,16.2) v3(55.3,17.3) v3(55.3,18.4) ; v3@54.9,16.2 54.9,17
  other v1: 40,69.2
  other v6: 4,70.2
GREEN0: HDR1.10 U1.D4 | length 31.2
  MidLayer1 w0.127: 25.5,44.4 25.5,45.4
  MidLayer1 w0.2: v1(18.1,69.2) 25.5,61.8 25.5,45.4 ; v1(25,43.9) 25.5,44.4
  Bottom Layer w0.2: HDR1.10@18.1,67.3 v1(18.1,69.2) ; U1.D4@24.5,43.4 v1(25,43.9)
GREEN1: HDR1.12 U1.E3 | length 31.6
  MidLayer1 w0.2: v1(18.9,70.1) 18.9,69.1 25.9,62.1 25.9,46.7 26,46.6 v1(26,44.9)
  Bottom Layer w0.2: HDR1.12@18.9,67.3 v1(18.9,70.1) ; U1.E3@25.5,44.4 v1(26,44.9)
HDRIVE: HDR1.18 U1.F5 | length 33.6
  MidLayer1 w0.127: 26.5,43.4 27.4,43.4 27.5,43.5 ; 27.5,44 27.5,43.5 ; 27.5,44.4 27.5,43.5
  MidLayer1 w0.2: v1(21.3,69.2) 27.9,62.6 27.9,44.8 27.5,44.4 ; v1(26,42.9) 26.5,43.4
  Bottom Layer w0.2: HDR1.18@21.3,67.3 v1(21.3,69.2) ; v1(26,42.9) U1.F5@26.5,42.4 ; U1.F5@26.5,42.4 26.55,42.45 U1.F5@26.5,42.4
IO0: HDR2.7 U1.E15 | length 34.4
  MidLayer1 w0.127: 24.5,31.5 24.5,32.4
  MidLayer1 w0.2: v1(17.3,7.3) 17.3,28.4 20.3,31.4 21.1,31.4 21.2,31.3 23.9,31.3 24.3,31.3 24.5,31.5 ; 24.5,32.4 v1(25,32.9)
  Bottom Layer w0.2: v1(17.3,7.3) HDR2.7@17.3,9.7 ; v1(25,32.9) 25.45,32.45 U1.E15@25.5,32.4
IO1: HDR2.9 U1.E16 | length 30.6
  MidLayer1 w0.2: v1(18.1,8.1) 18.1,21.4 18.8,22.1 18.8,27.8 21.9,30.9 24.7,30.9 25,31.2 v1(25,31.9)
  Bottom Layer w0.2: v1(18.1,8.1) HDR2.9@18.1,9.7 ; v1(25,31.9) U1.E16@25.5,31.4
IO2: HDR2.11 U1.F16 | length 32.3
  MidLayer1 w0.2: v1(18.9,7.3) 18.9,21.5 19.2,21.8 19.2,27.6 21.9,30.3 24.4,30.3 24.5,30.4 24.8,30.4 25.4,31 25.4,31.3 v1(26,31.9)
  Bottom Layer w0.2: v1(18.9,7.3) HDR2.11@18.9,9.7 ; v1(26,31.9) U1.F16@26.5,31.4
IO3: HDR2.13 U1.D17 | length 28.1
  MidLayer1 w0.2: v1(19.7,8.1) 19.7,24.3 19.6,24.4 19.6,27.4 22.1,29.9 v1(25,29.9)
  Bottom Layer w0.2: v1(19.7,8.1) HDR2.13@19.7,9.7 ; U1.D17@24.5,30.4 v1(25,29.9)
IO4: HDR2.15 U1.F17 | length 31.5
  MidLayer1 w0.127: 24.5,29.4 25.5,29.4
  MidLayer1 w0.2: v1(20.5,7.3) 20.5,24.4 20,24.9 20,25.8 20.7,26.5 20.9,26.5 21.6,27.2 21.6,28.8 22.2,29.4 22.3,29.5 24.4,29.5 24.5,29.4 ; 25.5,29.4 v1(26,28.9)
  Bottom Layer w0.2: v1(20.5,7.3) HDR2.15@20.5,9.7 ; v1(26,28.9) 26,29.9 U1.F17@26.5,30.4
IO5: HDR2.17 U1.C18 | length 24.6
  MidLayer1 w0.2: v1(21.3,8.1) 21.3,18.8 20.9,19.2 20.9,24.8 21.4,25.3 21.4,26.1 22,26.7 22,28.6 22.3,28.9 v1(23,28.9)
  Bottom Layer w0.2: v1(21.3,8.1) HDR2.17@21.3,9.7 ; v1(23,28.9) U1.C18@23.5,29.4
IO6: HDR2.19 U1.D18 | length 26.7
  MidLayer1 w0.127: 22.5,28.4 23.5,28.4
  MidLayer1 w0.2: v1(22.1,7.3) 22.1,19.1 23.1,20.1 23.1,26.5 22.4,27.2 22.4,28.3 22.5,28.4 ; 23.5,28.4 v1(24,28.9)
  Bottom Layer w0.2: v1(22.1,7.3) HDR2.19@22.1,9.7 ; v1(24,28.9) U1.D18@24.5,29.4